# Altium PCB board_2.PcbDoc (part 1 of 4)
Units mm, origin at the board's own origin, x right, y up, seen from the top; angles counter-clockwise.
Board outline 144.25 x 129 mm, 8 copper layers (Top Layer, PWR, Layer2, Layer3, Layer4, Layer5, GND, Bottom Layer); 112 components, 273 nets, 1028 pads, 798 vias.
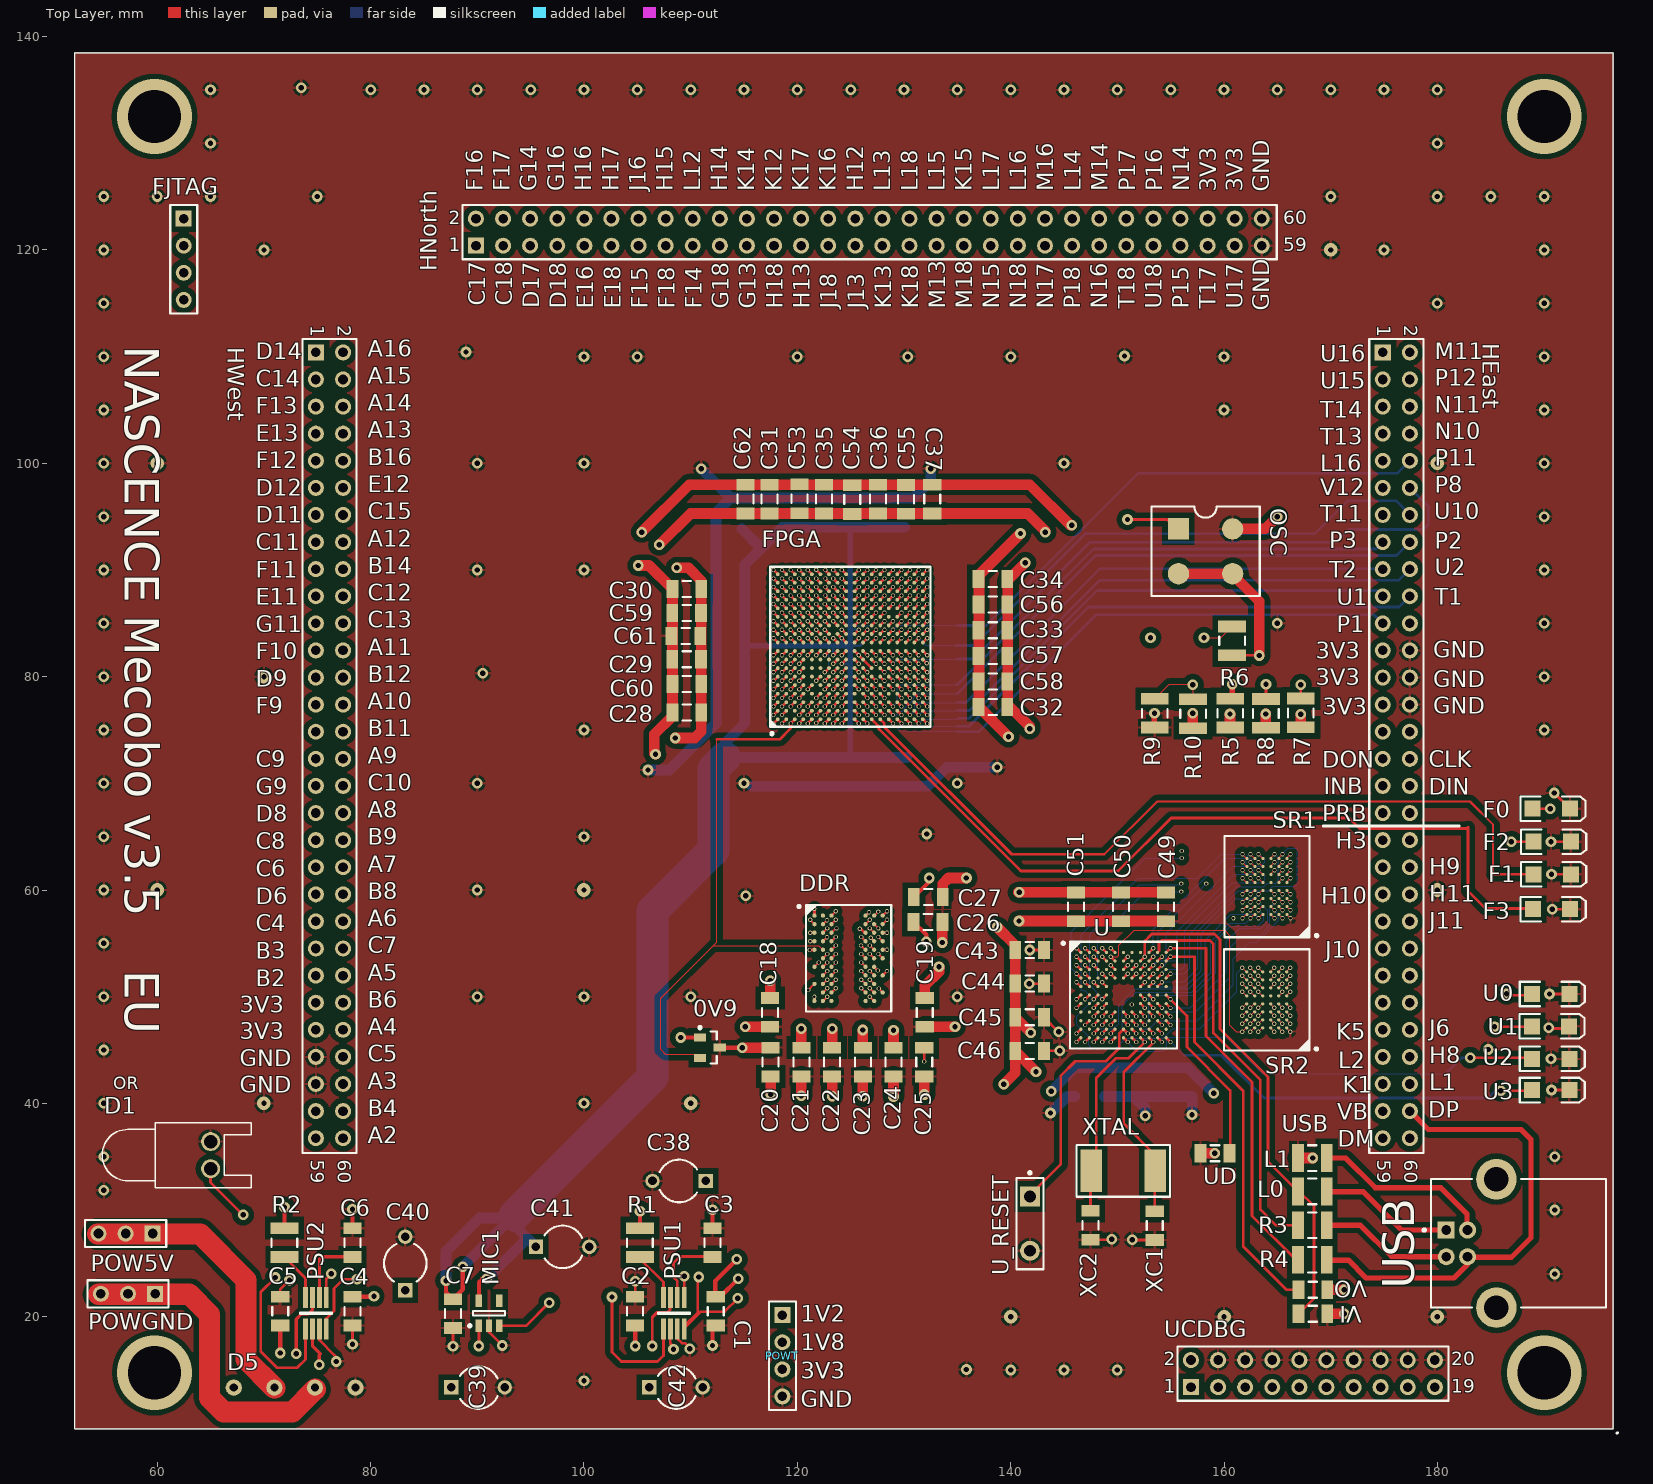
[diagram p0: Top Layer view]
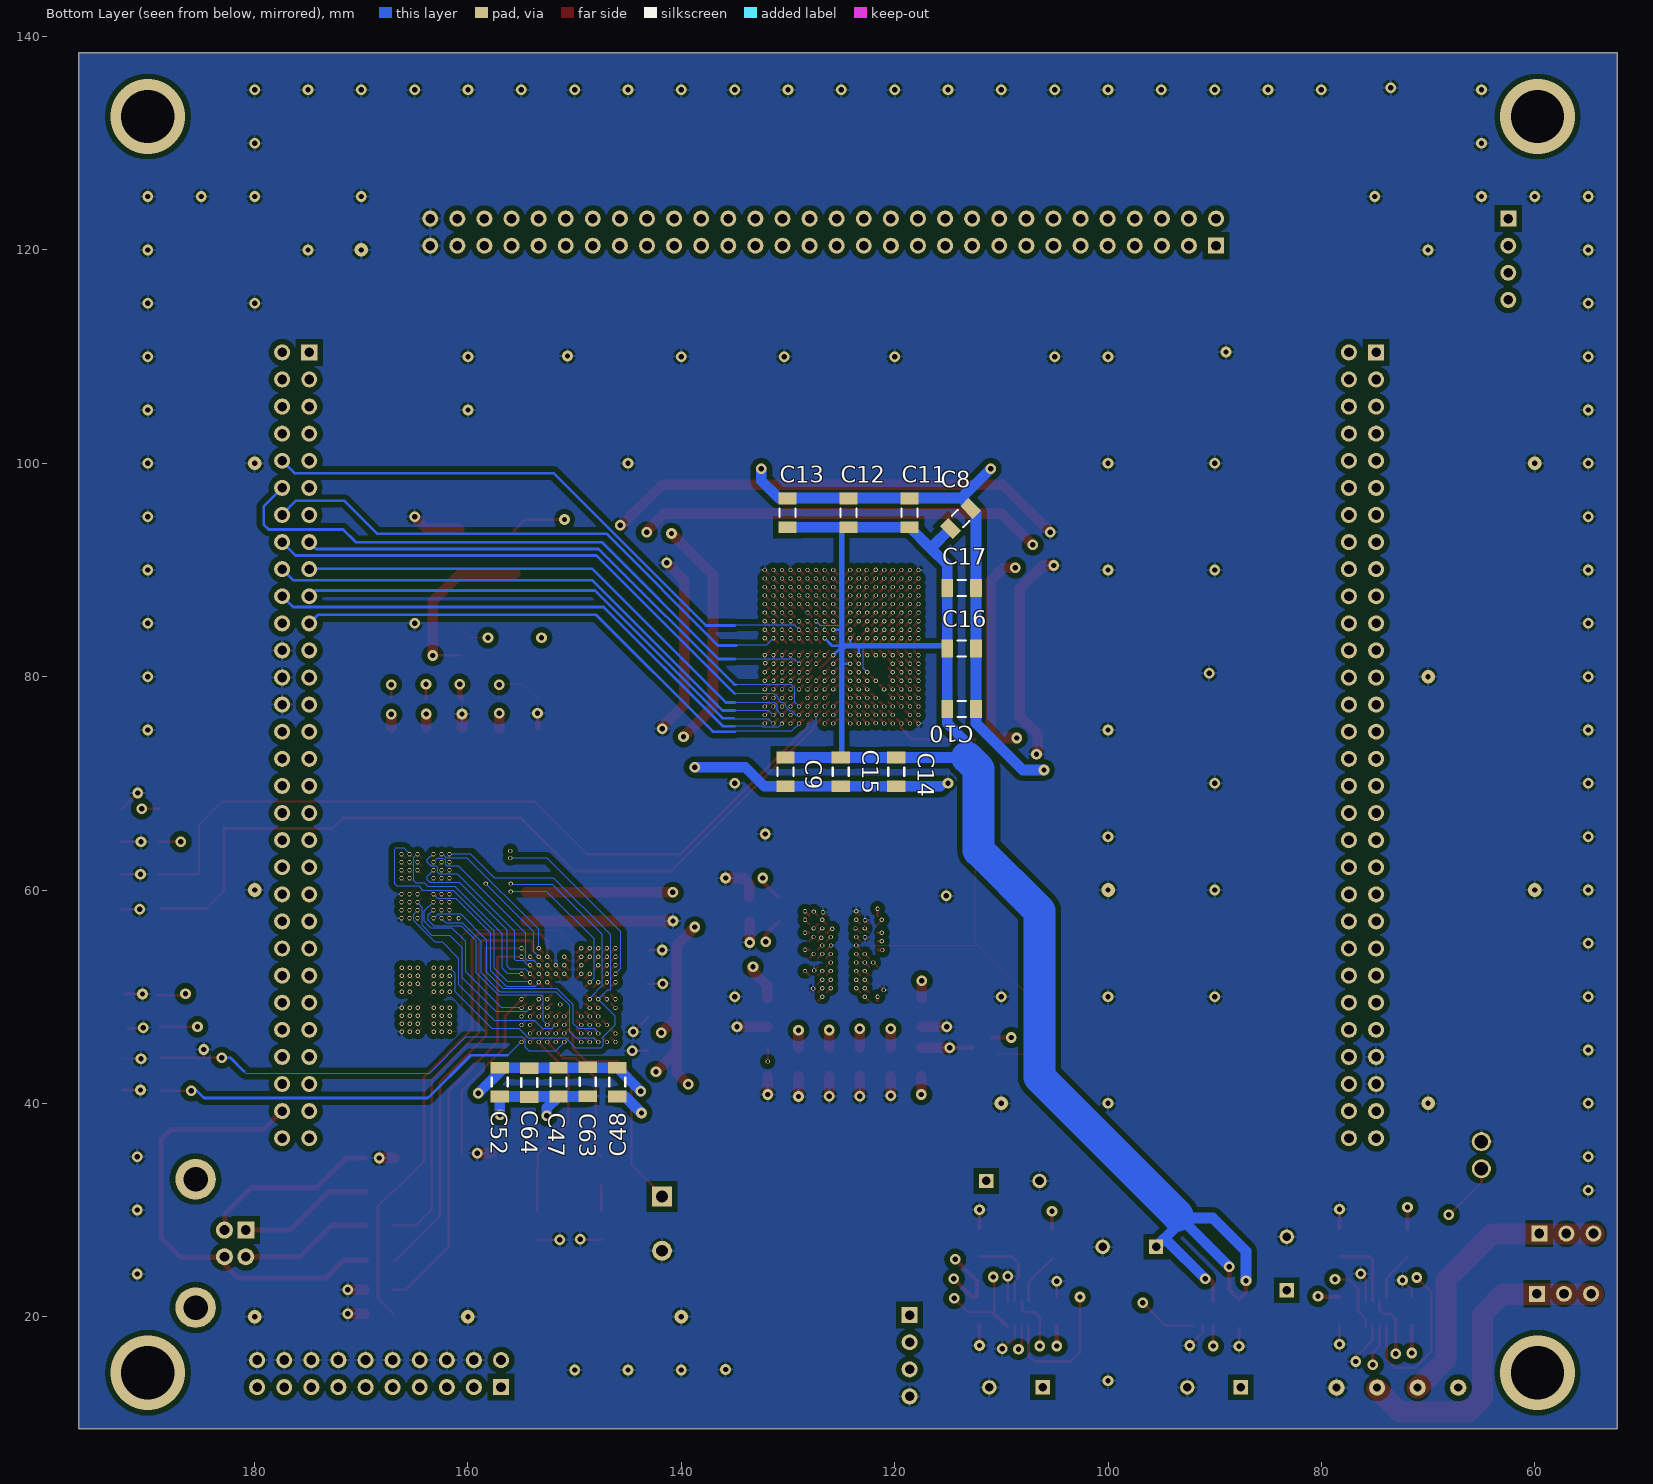
[diagram p1: Bottom Layer view, seen from below]
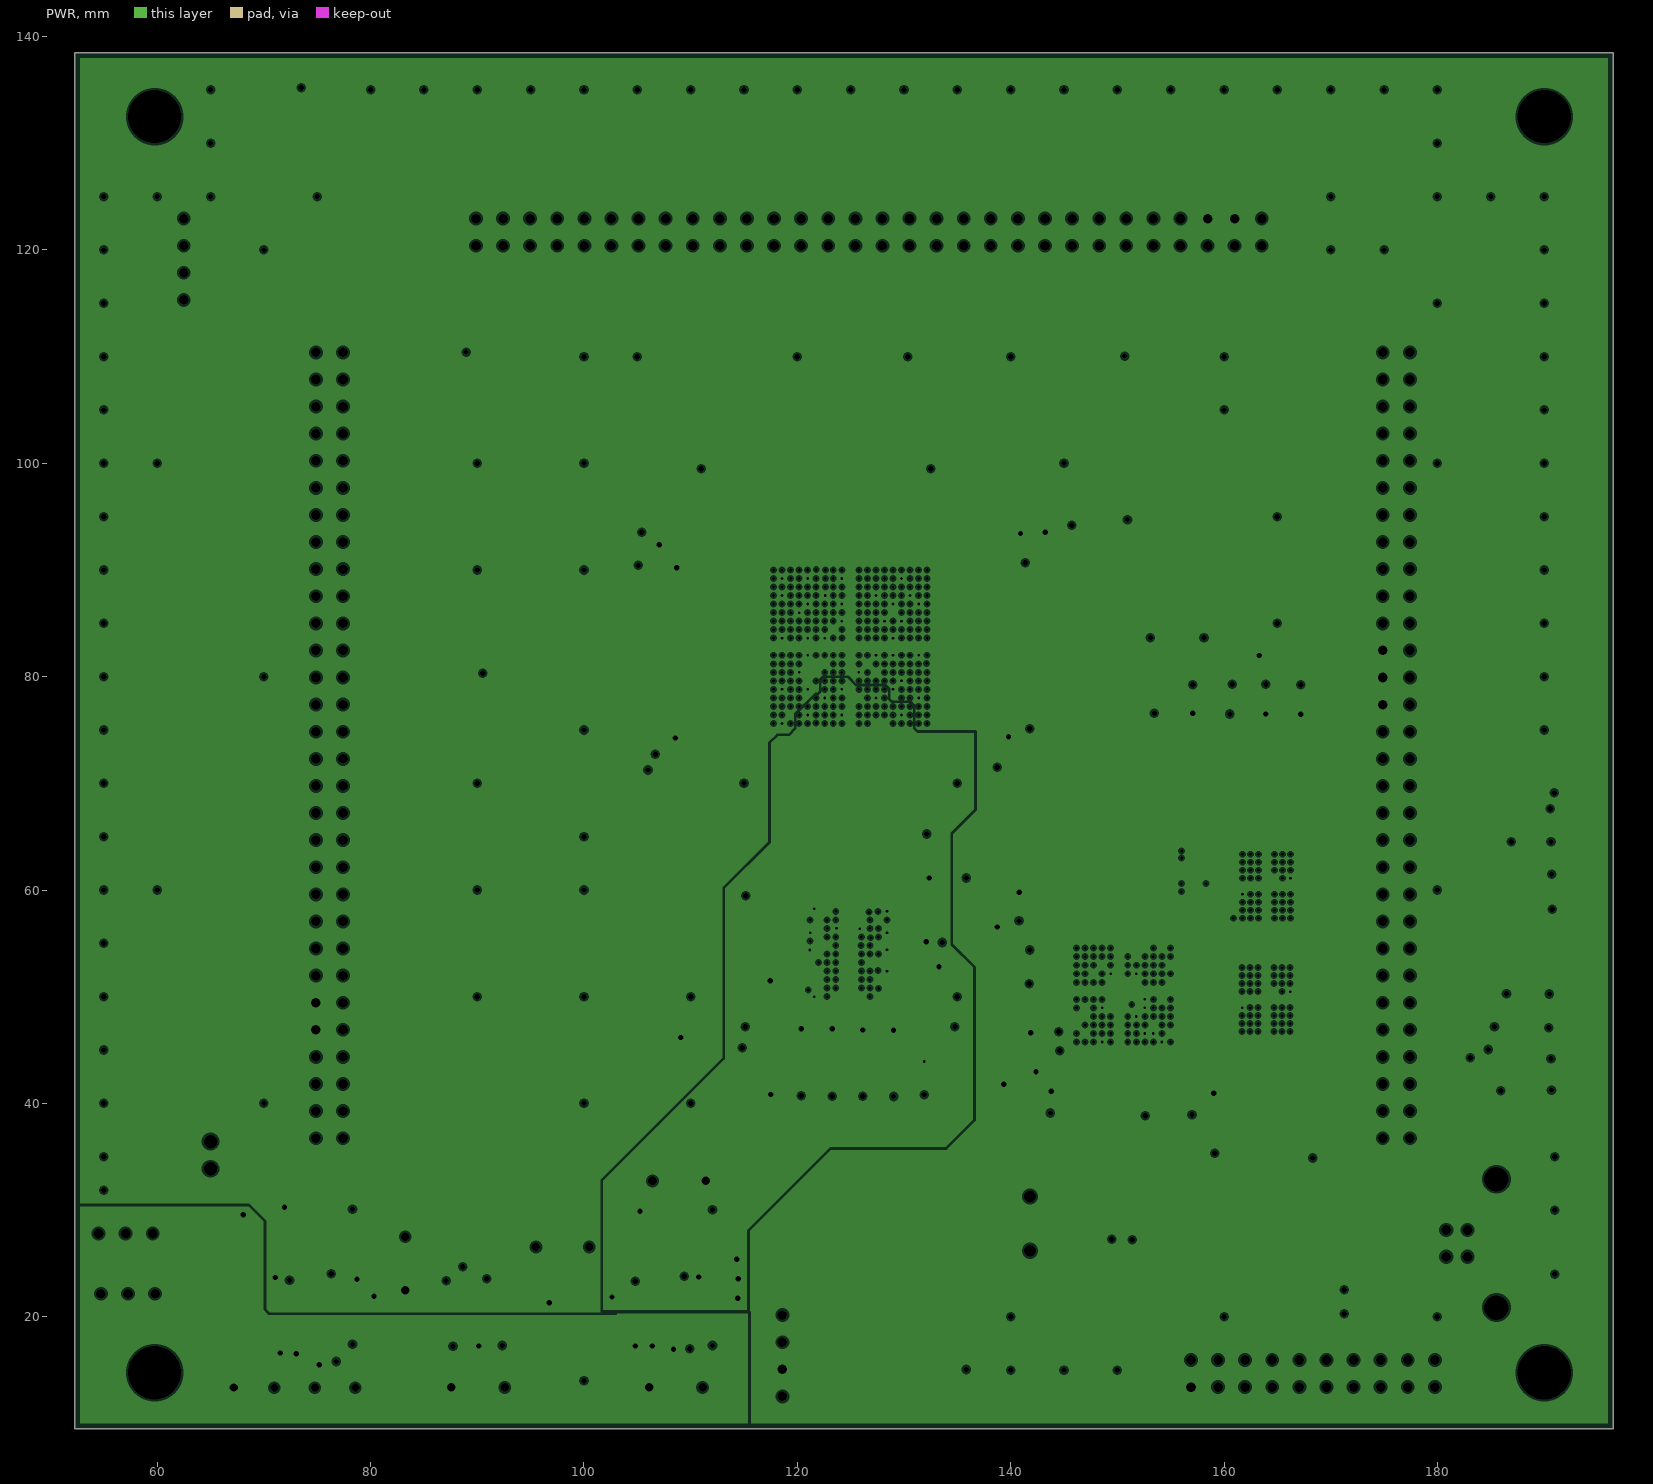
[diagram p2: PWR, clearances drawn from the general rule]
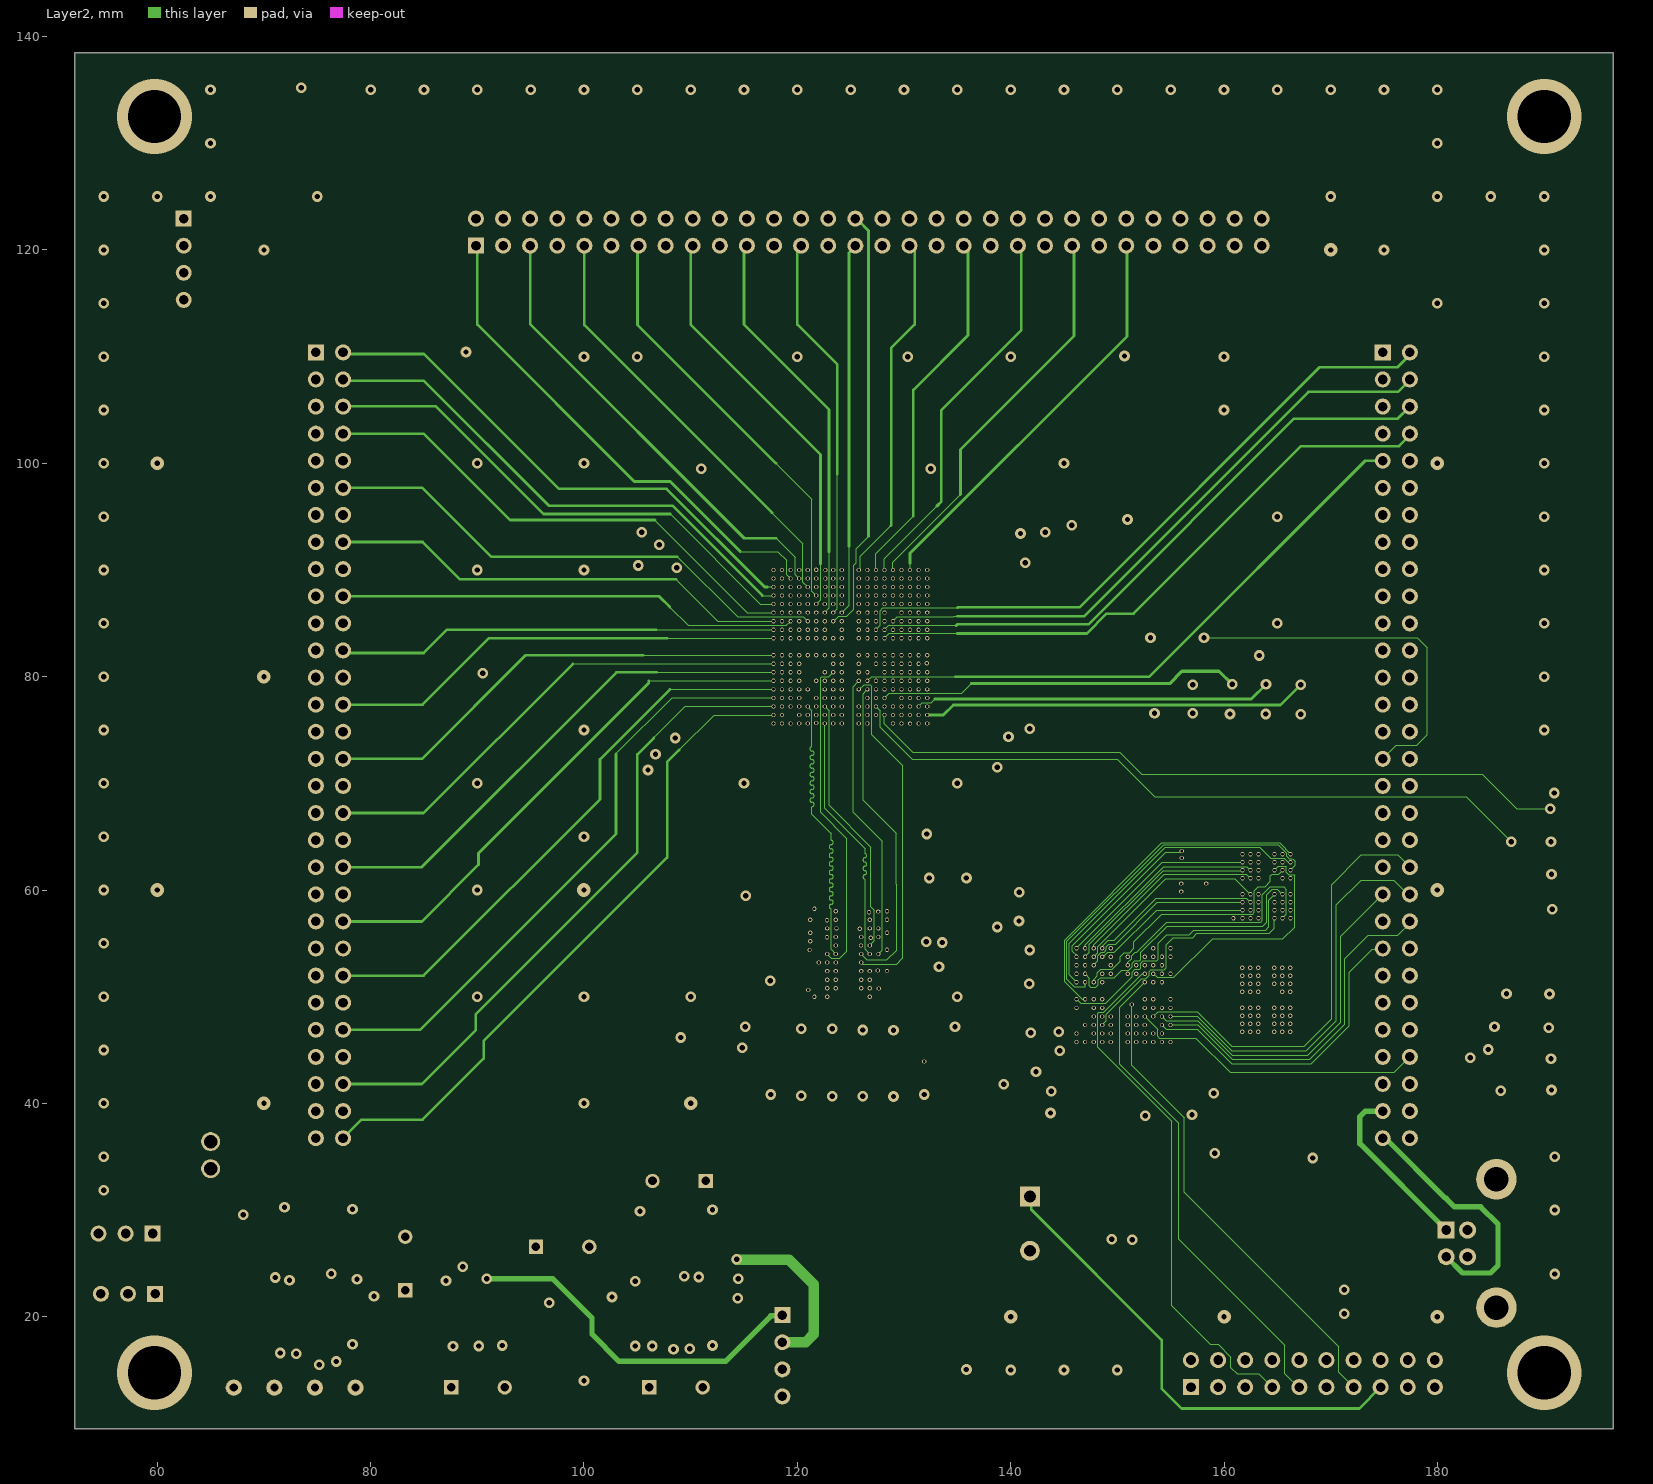
[diagram p3: Layer2]
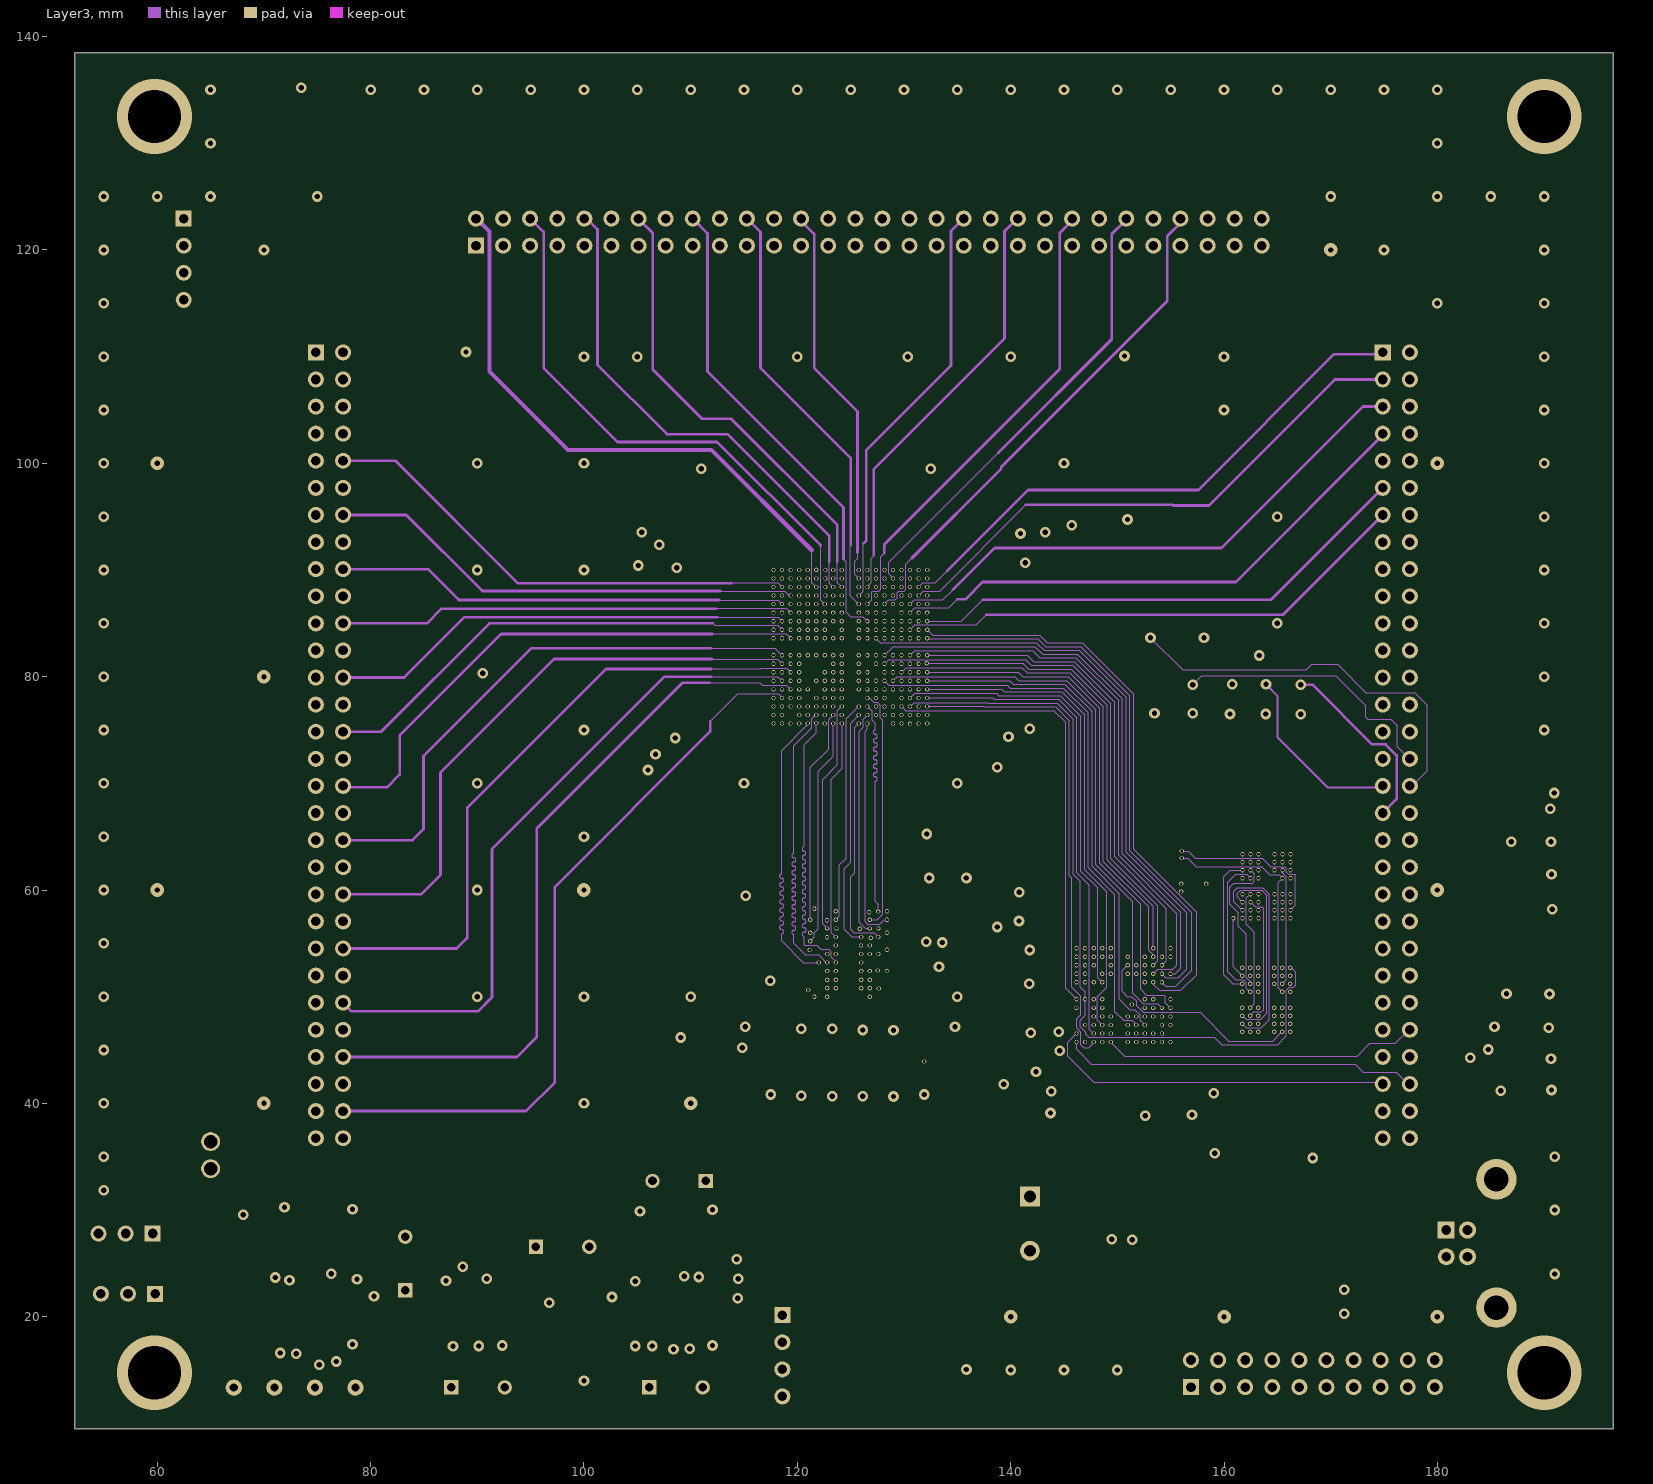
[diagram p4: Layer3]
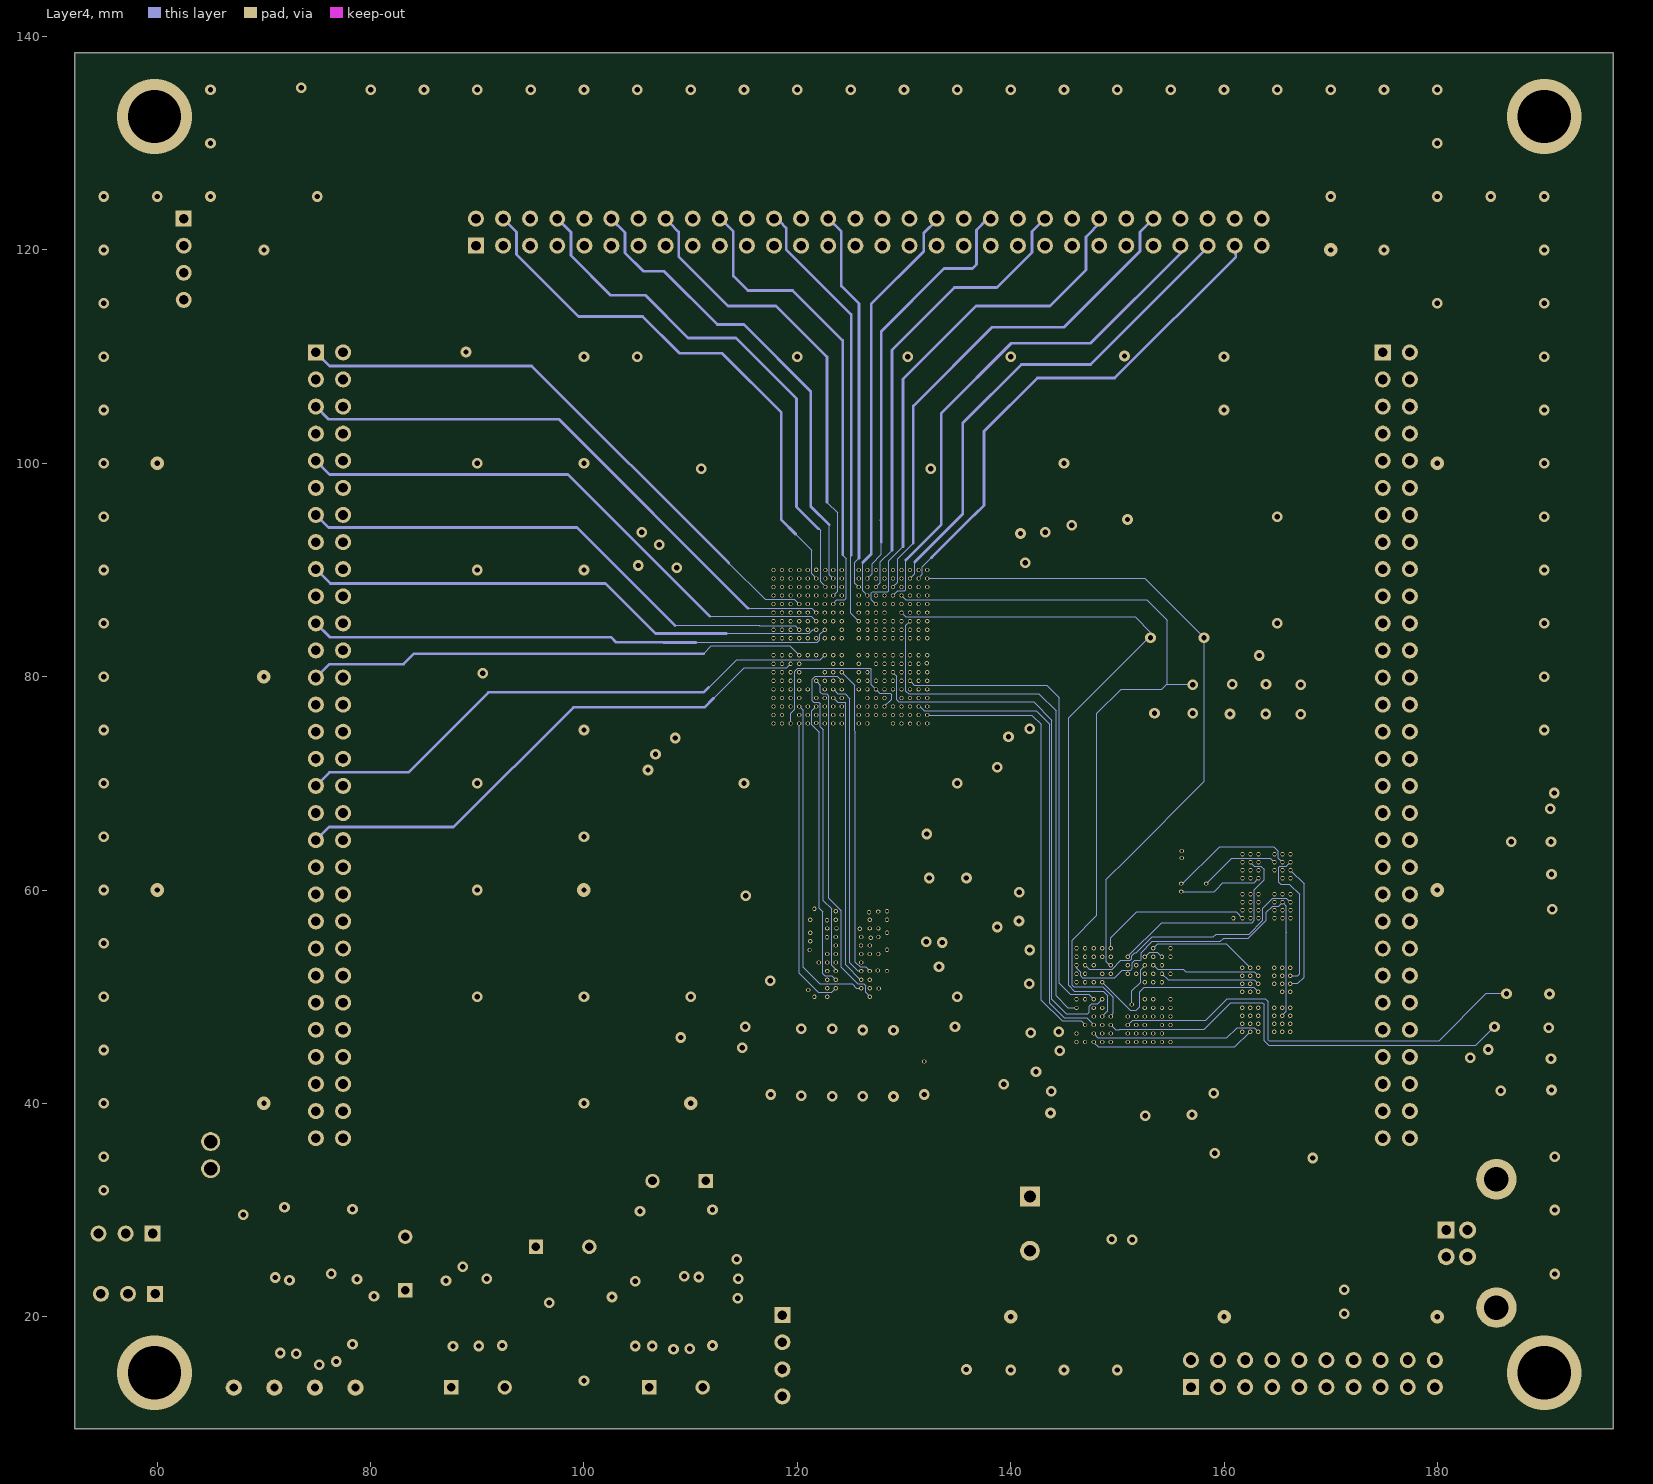
[diagram p5: Layer4]
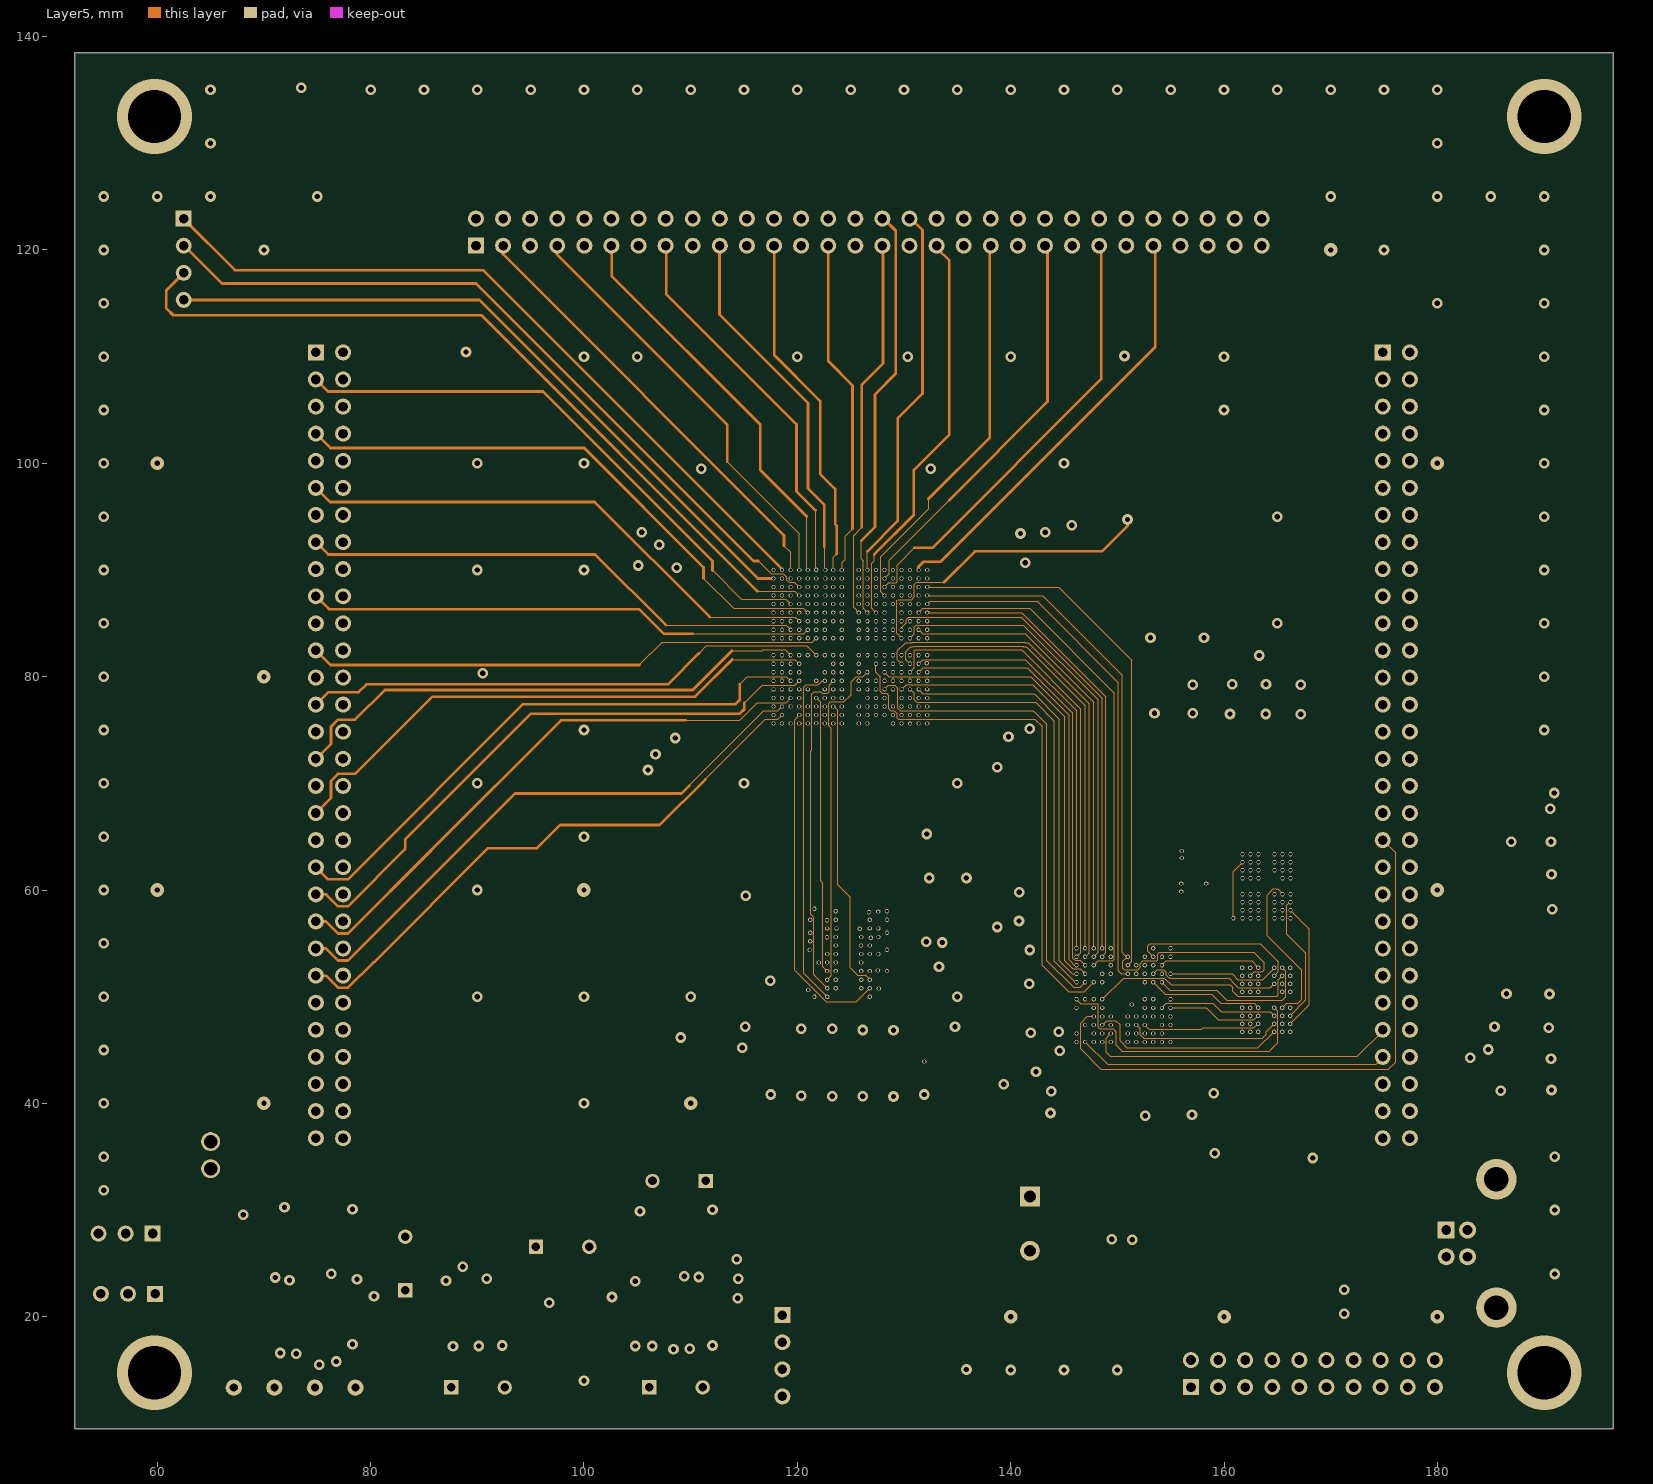
[diagram p6: Layer5]
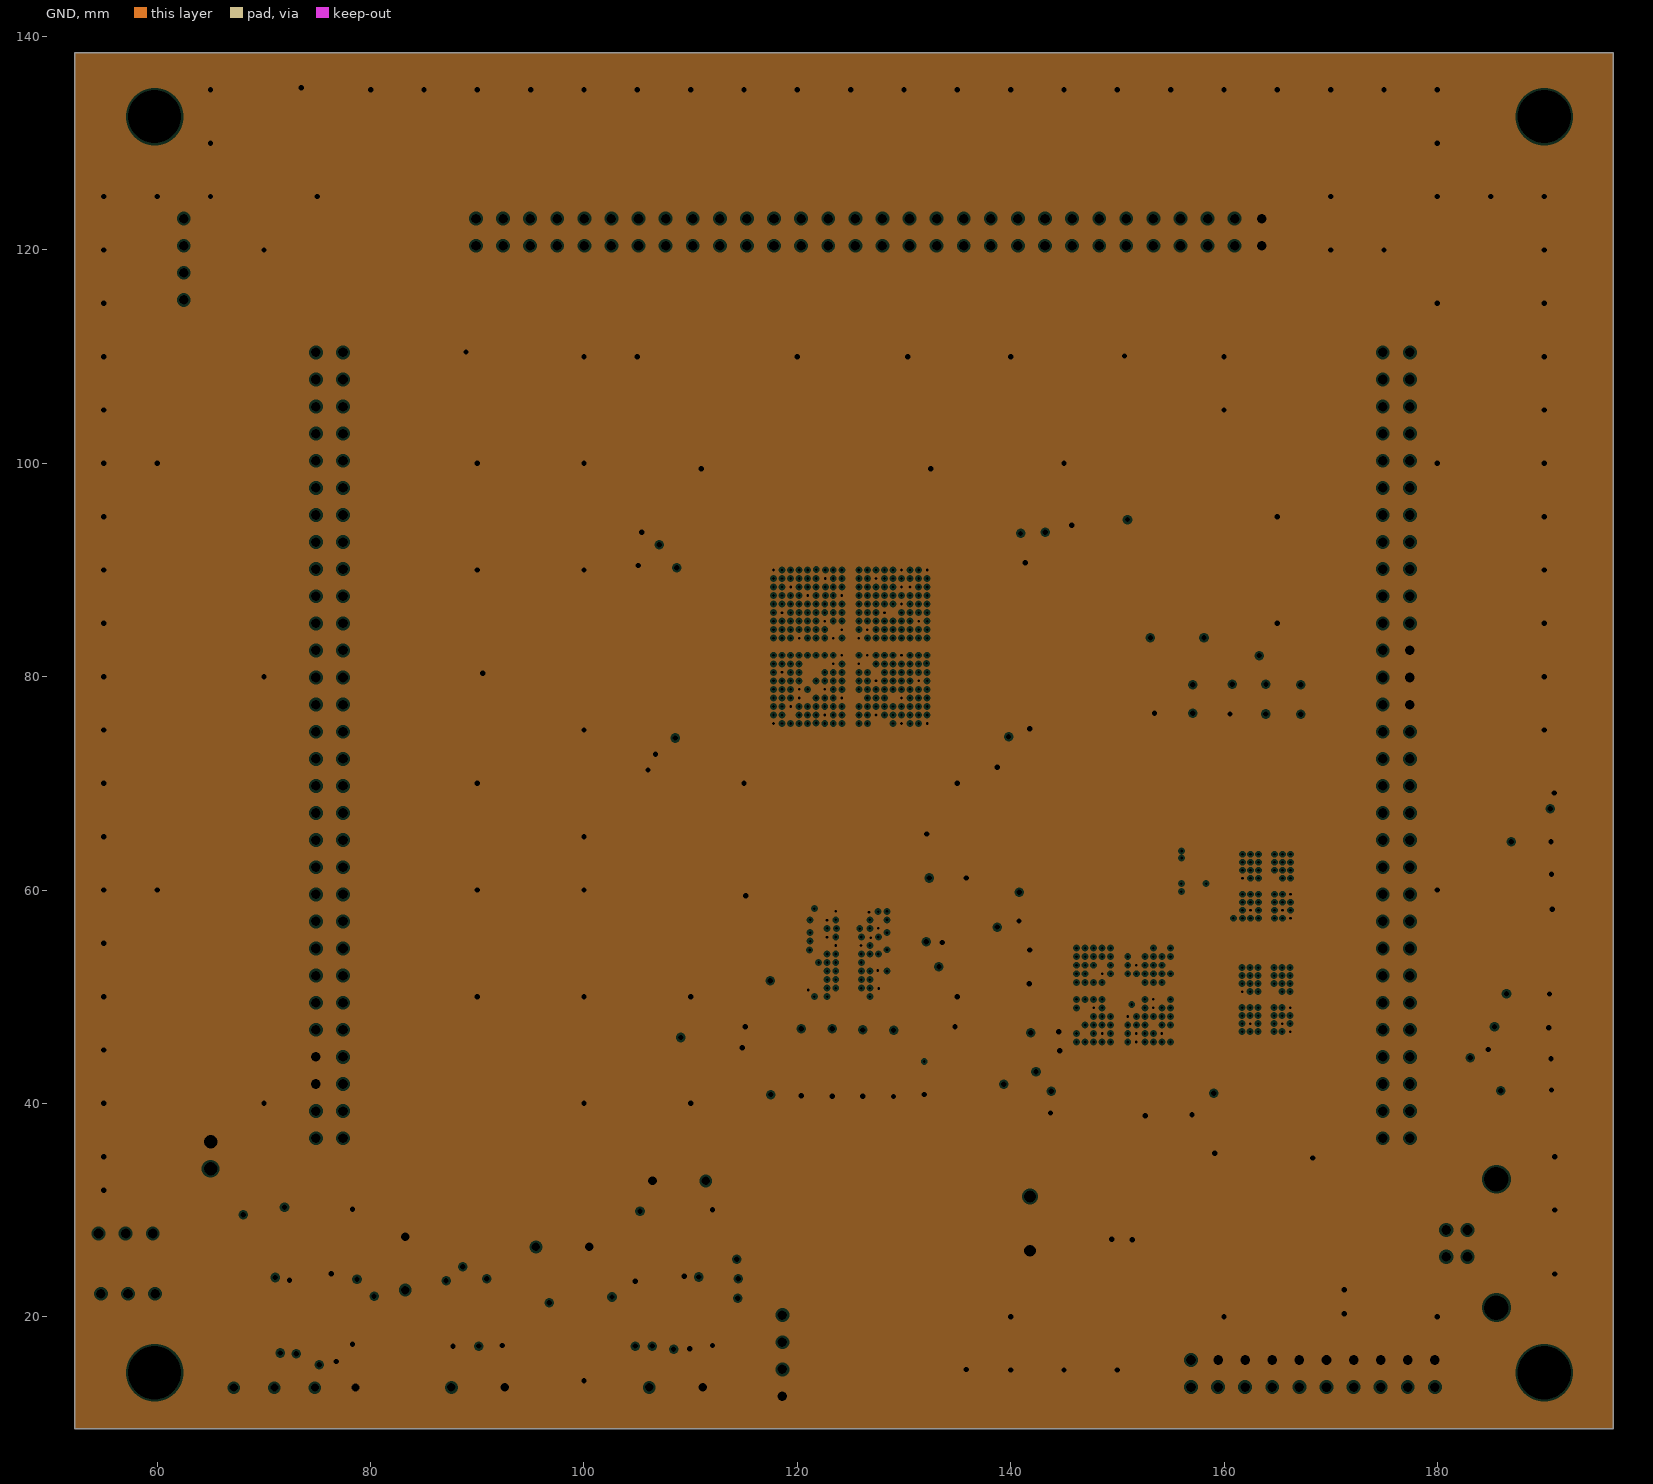
[diagram p7: GND, clearances drawn from the general rule]

## Layer stack, top to bottom
Top Layer: signal copper 0.0356
Dielectric: core 0.32, FR-4, Dk 4.8
PWR: plane copper 0.0356, net (Multiple Nets)
Dielectric: prepreg 0.32, FR-4, Dk 4.8
Layer2: signal copper 0.0356
Dielectric: core 0.32, FR-4, Dk 4.8
Layer3: signal copper 0.0356
Dielectric: prepreg 0.32, FR-4, Dk 4.8
Layer4: signal copper 0.0356
Dielectric: core 0.32, FR-4, Dk 4.8
Layer5: signal copper 0.0356
Dielectric: prepreg 0.32, FR-4, Dk 4.8
GND: plane copper 0.0356, net GND
Dielectric: core 0.32, FR-4, Dk 4.8
Bottom Layer: signal copper 0.0356

## Board outline
52.25,138.5 196.5,138.5 196.5,9.5 52.25,9.5

## Design rules (kind name [scope] priority, off if disabled: settings)
Clearance Clearance_9 [InNamedPolygon('Top Layer-No Net1')] p1: gap=0.5
Clearance Clearance_8 [InNamedPolygon('Top Layer-No Net')] p2: gap=0.5
Clearance Clearance_7 [InNamedPolygon('Top Layer-No Net1')] p3: gap=0.5
Clearance Clearance_6 [InNamedPolygon('Top Layer-No Net1')] p4: gap=0.5
Clearance Clearance_5 [InNamedPolygon('Top Layer-No Net1')] p5: gap=0.5
Clearance Clearance_4 [InNamedPolygon('Top Layer-No Net1')] p6: gap=0.5
Clearance Clearance_3 [InNamedPolygon('Top Layer-No Net')] p7: gap=0.5
Clearance Clearance_2 [InNamedPolygon('Top Layer-No Net')] p8: gap=0.5
Clearance Clearance_1 [InNamedPolygon('Top Layer-No Net')] p9: gap=0.5
Clearance "DDR DQ signals" [(InNetClass('DDR2.DDR_A[14..0]') OR InNet('DDR2.DDR_CLK_N') OR InNet('DDR2.DDR_CLK_P') OR InNet('DDR2.DDR_DQS_P') OR InNet('DDR2.DDR_ODT')OR InNet('DDR2.DDR_CASN') OR InNet('DDR2.DDR_WE') OR InNet('DDR2.DDR_RASN') OR InNetClass('DDR2.DDR_DQ[7..0]') OR InNet('DDR2.DDR_BA0') OR InNet('DDR2.DDR_BA1') OR InNet('DDR2.DDR_BA2') OR InNetClass('DDR2.DDR_DQ[7..0]') OR InNet('DDR2.DDR_DQS_N') OR InNet('DDR2.DDR_DQS_P') OR InNet('DDR2.DDR_LDM') OR InNetClass('DDR2.DDR_A[14..0]')) and (OnLayer('Layer2') or OnLayer('Layer3') or OnLayer('Layer4')) vs (InNetClass('DDR2.DDR_A[14..0]') OR InNet('DDR2.DDR_CLK_N') OR InNet('DDR2.DDR_CLK_P') OR InNet('DDR2.DDR_DQS_P') OR InNet('DDR2.DDR_ODT')OR InNet('DDR2.DDR_CASN') OR InNet('DDR2.DDR_WE') OR InNet('DDR2.DDR_RASN') OR InNetClass('DDR2.DDR_DQ[7..0]') OR InNet('DDR2.DDR_BA0') OR InNet('DDR2.DDR_BA1') OR InNet('DDR2.DDR_BA2') OR InNetClass('DDR2.DDR_DQ[7..0]') OR InNet('DDR2.DDR_DQS_N') OR InNet('DDR2.DDR_DQS_P') OR InNet('DDR2.DDR_LDM') OR InNetClass('DDR2.DDR_A[14..0]')) and (OnLayer('Layer2') or OnLayer('Layer3') or OnLayer('Layer4'))] p10: gap=0.3
Clearance DDR_ADDR_AND_CONTROL [(InNetClass('DDR2.DDR_A[14..0]') OR     InNet('DDR2.DDR_BA0') OR InNet('DDR2.DDR_BA1') OR InNet('DDR2.DDR_BA2')) and (OnLayer('Layer3') or OnLayer('Layer4')) vs (   InNetClass('DDR2.DDR_A[14..0]') OR     InNet('DDR2.DDR_BA0') OR InNet('DDR2.DDR_BA1') OR InNet('DDR2.DDR_BA2') ) and (not IsVia)] p11: gap=0.3
Clearance "BGA clearance" [IsTrack vs not IsVia] p12: gap=0.1
Clearance [All] p13: gap=0.1
DiffPairsRouting [All] p1: maxlimit=0.254 minlimit=0.254 mostfreqgap=0.254 maxuncoupledlength=12.7
FanoutControl Fanout_BGA [IsBGA] p1: bgadir=Out bgaviamode=Centered fanoutstyle=BGA fanoutdirection=Alternating viagrid=0.025 // Fanout_BGA (Default Rule)
FanoutControl Fanout_Default [All] p5: bgadir=Out bgaviamode=Centered fanoutstyle=BGA fanoutdirection=Alternating viagrid=0.025 // Fanout_Default (Default Rule)
HoleSize [All] p1: absolutevalues=TRUE maxlimit=5 minlimit=0.025 maxpercent=80.000 minpercent=20.000
MatchedLengths CLK_AND_DQS [InNet('DDR2.DDR_DQS_P') OR InNet('DDR2.DDR_CLK_P')] p1: tolerance=6.53 checknetsindiffpair=TRUE checkdiffpairvsdiffpair=TRUE checkothers=TRUE
MatchedLengths DDR_CLK_DIFF_PAIR [InNet('DDR2.DDR_CLK_N')OR InNet('DDR2.DDR_CLK_P')] p2: tolerance=0.254 checknetsindiffpair=TRUE checkdiffpairvsdiffpair=TRUE checkothers=TRUE
MatchedLengths DQS_DIFF_PAIR [InNet('DDR2.DDR_DQS_N') OR InNet('DDR2.DDR_DQS_P')] p3: tolerance=0.254 checknetsindiffpair=TRUE checkdiffpairvsdiffpair=TRUE checkothers=TRUE
MatchedLengths DDR_ADDR [InNetClass('DDR2.DDR_A[13..0]') OR InNet('DDR2.DDR_CLK_N') OR InNet('DDR2.DDR_CLK_P') OR InNet('DDR2.DDR_BA0') OR InNet('DDR2.DDR_BA1') OR InNet('DDR2.DDR_BA2') OR InNet('DDR2.DDR_CASN') OR InNet('DDR2.DDR_RASN') OR InNet('DDR2.DDR_CKE') OR InNet('DDR2.DDR_WE') OR InNet('DDR2.DDR_ODT')] p4: tolerance=7.62 checknetsindiffpair=TRUE checkdiffpairvsdiffpair=TRUE checkothers=TRUE
MatchedLengths DDR_DQ_GROUP [(InNetClass('DDR2.DDR_DQ[7..0]')) OR InNet('DDR2.DDR_DQS_N') OR InNet('DDR2.DDR_DQS_P') OR InNet('DDR2.DDR_LDM')] p5 off: tolerance=3.81 checknetsindiffpair=TRUE checkdiffpairvsdiffpair=TRUE checkothers=TRUE
MaxMinImpedance [InNet('DDR_CLK_N')] p1: minimum=95.00 maximum=105.0
MinimumSolderMaskSliver [All] p1: minsoldermaskwidth=0
PlaneClearance SRAM [InComponent('SR1')  and IsVia] p1 off: clearance=1
PlaneClearance [All] p2: clearance=0.2
PlaneConnect [All] p1: planeconnectstyle=Direct reliefexpansion=0.508 reliefentries=4 reliefconductorwidth=0.254 reliefairgap=0.254
PolygonConnect [All] p1: connectstyle=Relief reliefconductorwidth=0.254 reliefentries=4 polygonreliefangle="90 Angle" airgapwidth=0.254
RoutingLayers RoutingLayers_1 [All] p1: top layer_v5=TRUE mid layer 1_v5=TRUE mid layer 2_v5=TRUE mid layer 3_v5=TRUE mid layer 4_v5=TRUE bottom layer_v5=TRUE
RoutingLayers "DDR Layers" [(InNetClass('DDR_DQ[7..0]'))] p2: top layer_v5=FALSE mid layer 1_v5=TRUE mid layer 2_v5=TRUE mid layer 3_v5=TRUE mid layer 4_v5=TRUE bottom layer_v5=FALSE
RoutingPriority DDR_DQ [(InNetClass('DDR_DQ[7..0]') OR InNet('DDR_DQS') OR InNet('DDR_LDM'))] p1: routingpriority=100
RoutingPriority [All] p2: routingpriority=0
RoutingVias [All] p1: holewidth=0.2 width=0.4 viastyle="Through Hole" minholewidth=0.2 minwidth=0.35 maxholewidth=1 maxwidth=3
SMDNeckDown [All] p1: percent=100.000
SilkToSilkClearance [All] p1 off: silktosilkclearance=0.254
SilkscreenOverComponentPads RESET_Button_Waiver [HasFootprint('SPST-2')] p1: minsilkscreentomaskgap=0.1
SilkscreenOverComponentPads SilkscreenOverComponentPads_1 [All] p2: minsilkscreentomaskgap=0.254
SolderMaskExpansion SolderMaskExpansion_FPGA_BGA_Breakout [(HasFootprint('CSG324'))] p1: expansion=0.06
SolderMaskExpansion [All] p2: expansion=0.102
Width [All] p1: maxlimit=5 minlimit=0.1 preferedwidth=0.1
17 further rules are at their usual default settings.

## Classes and differential pairs
component class Headers: HEast HNorth HWest
component class DDR2_MEMORY: DDR
component class U_psu: 0V9 C38 C39 C40 C41 C42 D1 D5 POW5V POWGND POWT
net class DDR2.DDR_DQ[7..0]: DDR2.DDR_DQ0 DDR2.DDR_DQ1 DDR2.DDR_DQ2 DDR2.DDR_DQ3 DDR2.DDR_DQ4 DDR2.DDR_DQ5 DDR2.DDR_DQ6 DDR2.DDR_DQ7
net class DDR2.DDR_A[13..0]: DDR2.DDR_A0 DDR2.DDR_A1 DDR2.DDR_A2 DDR2.DDR_A3 DDR2.DDR_A4 DDR2.DDR_A5 DDR2.DDR_A6 DDR2.DDR_A7 DDR2.DDR_A8 DDR2.DDR_A9 DDR2.DDR_A10 DDR2.DDR_A11 DDR2.DDR_A12 DDR2.DDR_A13
component class toplevel: L1 OSC R5 USB
net class HEADERS.HW[52..0]: HEADERS.HW0 HEADERS.HW1 HEADERS.HW2 HEADERS.HW3 HEADERS.HW4 HEADERS.HW5 HEADERS.HW6 HEADERS.HW7 HEADERS.HW8 HEADERS.HW9 HEADERS.HW10 HEADERS.HW11 HEADERS.HW12 HEADERS.HW13 HEADERS.HW14 HEADERS.HW15 HEADERS.HW16 HEADERS.HW17 HEADERS.HW18 HEADERS.HW19 HEADERS.HW20 HEADERS.HW21 HEADERS.HW22 HEADERS.HW23 HEADERS.HW24 HEADERS.HW25 HEADERS.HW26 HEADERS.HW27 HEADERS.HW28 HEADERS.HW29 HEADERS.HW30 HEADERS.HW31 HEADERS.HW32 HEADERS.HW33 HEADERS.HW34 HEADERS.HW35 HEADERS.HW36 HEADERS.HW37 HEADERS.HW38 HEADERS.HW39 HEADERS.HW40 HEADERS.HW41 HEADERS.HW42 HEADERS.HW43 HEADERS.HW44 HEADERS.HW45 HEADERS.HW46 HEADERS.HW47 HEADERS.HW48 HEADERS.HW49 HEADERS.HW50 HEADERS.HW51 HEADERS.HW52 HW0 HW1 HW2 HW3 HW4 HW5 HW6 HW7 HW8 HW9 HW10 HW11 HW12 HW13 HW14 HW15 HW16 HW17 HW18 HW19 HW20 HW21 HW22 HW23 HW24 HW25 HW26 HW27 HW28 HW29 HW30 HW31 HW32 HW33 HW34 HW35 HW36 HW37 HW38 HW39 HW40 HW41 HW42 HW43 HW44 HW45 HW46 HW47 HW48 HW49 HW50 HW51 HW52 HW53 HW54 HW55 HW59
component class "EFN32GG990 (uC)": L0 R3 R4 U U0 U1 U2 U3 U_RESET UCDBG UD VI VO XC1 XC2 XTAL
net class HEADERS.HN[55..0]: HEADERS.HN0 HEADERS.HN1 HEADERS.HN2 HEADERS.HN3 HEADERS.HN4 HEADERS.HN5 HEADERS.HN6 HEADERS.HN7 HEADERS.HN8 HEADERS.HN9 HEADERS.HN10 HEADERS.HN11 HEADERS.HN12 HEADERS.HN13 HEADERS.HN14 HEADERS.HN15 HEADERS.HN16 HEADERS.HN17 HEADERS.HN18 HEADERS.HN19 HEADERS.HN20 HEADERS.HN21 HEADERS.HN22 HEADERS.HN23 HEADERS.HN24 HEADERS.HN25 HEADERS.HN26 HEADERS.HN27 HEADERS.HN28 HEADERS.HN29 HEADERS.HN30 HEADERS.HN31 HEADERS.HN32 HEADERS.HN33 HEADERS.HN34 HEADERS.HN35 HEADERS.HN36 HEADERS.HN37 HEADERS.HN38 HEADERS.HN39 HEADERS.HN40 HEADERS.HN41 HEADERS.HN42 HEADERS.HN43 HEADERS.HN44 HEADERS.HN45 HEADERS.HN46 HEADERS.HN47 HEADERS.HN48 HEADERS.HN49 HEADERS.HN50 HEADERS.HN51 HEADERS.HN52 HEADERS.HN53 HEADERS.HN54 HEADERS.HN55 HN0 HN1 HN2 HN3 HN4 HN5 HN6 HN7 HN8 HN9 HN10 HN11 HN12 HN13 HN14 HN15 HN16 HN17 HN18 HN19 HN20 HN21 HN22 HN23 HN24 HN25 HN26 HN27 HN28 HN29 HN31 HN32 HN33 HN34 HN35 HN36 HN37 HN38 HN39 HN40 HN41 HN42 HN43 HN44 HN45 HN46 HN47 HN48 HN49 HN50 HN51 HN52 HN53 HN54 HN55 HN56 HN57 HN58 HN59
component class U_xcs6slx25-2csg324i: * F0 F1 F2 F3 FJTAG FPGA FPGAA FPGAB FPGAC FPGAD FPGAE FPGAF FPGAG FPGAH R6 R7 R8 R9 R10
net class ADDR[20..0]: ADDR0 ADDR1 ADDR2 ADDR3 ADDR4 ADDR5 ADDR6 ADDR7 ADDR8 ADDR9 ADDR10 ADDR11 ADDR12 ADDR13 ADDR14 ADDR15 ADDR16 ADDR17 ADDR18 ADDR19 ADDR20
net class DATA[15..0]: DATA0 DATA1 DATA2 DATA3 DATA4 DATA5 DATA6 DATA7 DATA8 DATA9 DATA10 DATA11 DATA12 DATA13 DATA14 DATA15
net class HE[0..24]: HE2 HE3 HE4 HE5 HE6 HE7 HE8 HE9 HE10 HE11 HE12 HE13 HE14 HE15 HE16 HE17 HE18 HE19 HE20 HE21 HE22
net class MISC[27..0]: MISC0 MISC1 MISC2 MISC3 MISC4 MISC8 MISC10 MISC11 MISC12 MISC13 MISC14 MISC15 MISC16 MISC18 MISC19 MISC21 MISC23 MISC24 MISC25 MISC26 MISC27
component class MAX8860EUA18: C1 C2 C3 PSU1 R1
component class MAX8860EUA33: C4 C5 C6 PSU2 R2
component class U_MIC5248: C7 MIC1
channel class 8860: MAX8860EUA18 MAX8860EUA33
component class U_decoupling: C8 C9 C10 C11 C12 C13 C14 C15 C16 C17 C18 C19 C20 C21 C22 C23 C24 C25 C26 C27 C28 C29 C30 C31 C32 C33 C34 C35 C36 C37 C43 C44 C45 C46 C47 C48 C49 C50 C51 C52 C53 C54 C55 C56 C57 C58 C59 C60 C61 C62 C63 C64
component class SRAMs: SR1 SR2
differential pair DDR2.DDR_CLK: +DDR2.DDR_CLK_P -DDR2.DDR_CLK_N
differential pair DDR2.DDR_DQS: +DDR2.DDR_DQS_P -DDR2.DDR_DQS_N

## Components (designator, comment, footprint, x,y, rotation, side; value= is the part's Value field where it differs from the comment)
0V9 "ISL21080DIH309Z-TK" SOT95P215X112-3N 111.8,45.225 r0 top
C1 "Cap Semi" C1206 112.35,20.525 r90 top
C2 "Cap Semi" C1206 104.8,20.525 r270 top
C3 "Cap Semi" C1206 112.05,26.95 r270 top
C4 "Cap Semi" C1206 78.3,20.525 r90 top (schematic designator C1)
C5 "Cap Semi" C1206 71.525,20.525 r270 top (schematic designator C2)
C6 "Cap Semi" C1206 78.3,26.95 r270 top (schematic designator C3)
C7 "Cap Semi" C1206 87.725,20.3 r90 top (schematic designator C4)
C8 "Cap Semi" C1206 113.825,94.825 r315 bottom (schematic designator C5)
C9 "Cap Semi" C1206 130.25,71.075 r90 bottom (schematic designator C6)
C10 "Cap Semi" C1206 113.725,76.975 r0 bottom (schematic designator C7)
C11 "Cap Semi" C1206 118.6,95.35 r270 bottom (schematic designator C8)
C12 "Cap Semi" C1206 124.325,95.35 r270 bottom (schematic designator C9)
C13 "Cap Semi" C1206 130.05,95.35 r270 bottom (schematic designator C10)
C14 "Cap Semi" C1206 119.85,71.075 r90 bottom (schematic designator C11)
C15 "Cap Semi" C1206 125.05,71.075 r90 bottom (schematic designator C12)
C16 "Cap Semi" C1206 113.725,82.637 r0 bottom (schematic designator C13)
C17 "Cap Semi" C1206 113.725,88.3 r0 bottom (schematic designator C14)
C18 "Cap Semi" C1206 117.45,48.525 r90 top (schematic designator C15)
C19 "Cap Semi" C1206 131.95,48.525 r90 top (schematic designator C16)
C20 "Cap Semi" C1206 117.5,43.875 r270 top (schematic designator C17)
C21 "Cap Semi" C1206 120.38,43.875 r90 top (schematic designator C18)
C22 "Cap Semi" C1206 123.26,43.875 r90 top (schematic designator C19)
C23 "Cap Semi" C1206 126.14,43.875 r90 top (schematic designator C20)
C24 "Cap Semi" C1206 129.02,43.875 r90 top (schematic designator C21)
C25 "Cap Semi" C1206 131.9,43.875 r90 top (schematic designator C22)
C26 "Cap Semi" C1206 132.25,57 r180 top (schematic designator C23)
C27 "Cap Semi" C1206 132.275,59.35 r180 top (schematic designator C24)
C28 "Cap Semi" C1206 109.65,76.625 r0 top (schematic designator C25)
C29 "Cap Semi" C1206 109.625,81.625 r0 top (schematic designator C26)
C30 "Cap Semi" C1206 109.65,88.225 r0 top (schematic designator C27)
C31 "Cap Semi" C1206 117.4,96.65 r270 top (schematic designator C28)
C32 "Cap Semi" C1206 138.325,77.151 r180 top (schematic designator C29)
C33 "Cap Semi" C1206 138.325,84.35 r180 top (schematic designator C30)
C34 "Cap Semi" C1206 138.325,89.15 r180 top (schematic designator C31)
C35 "Cap Semi" C1206 122.483,96.65 r270 top (schematic designator C32)
C36 "Cap Semi" C1206 127.567,96.65 r270 top (schematic designator C33)
C37 "Cap Semi" C1206 132.65,96.65 r270 top (schematic designator C34)
C38 "Cap2" CAPR5-4X5 108.925,32.725 r180 top (schematic designator C)
C39 "Cap2" CAPR5-4X5 90.075,13.375 r0 top (schematic designator C)
C40 "Cap2" CAPR5-4X5 83.25,25 r90 top (schematic designator C)
C41 "Cap2" CAPR5-4X5 98,26.55 r0 top (schematic designator C)
C42 "Cap2" CAPR5-4X5 108.625,13.375 r0 top (schematic designator C6)
C43 "Cap Semi" C1206 141.775,54.375 r180 top (schematic designator C36)
C44 "Cap Semi" C1206 141.775,51.225 r180 top (schematic designator C37)
C45 "Cap Semi" C1206 141.775,48.075 r180 top (schematic designator C38)
C46 "Cap Semi" C1206 141.775,44.925 r180 top (schematic designator C39)
C47 "Cap Semi" C1206 151.512,42 r90 bottom (schematic designator C40)
C48 "Cap Semi" C1206 146,42 r90 bottom (schematic designator C41)
C49 "Cap Semi" C1206 154.55,58.425 r90 top (schematic designator C42)
C50 "Cap Semi" C1206 150.337,58.425 r90 top (schematic designator C43)
C51 "Cap Semi" C1206 146.125,58.425 r90 top (schematic designator C44)
C52 "Cap Semi" C1206 157.025,42 r90 bottom (schematic designator C45)
C53 "Cap Semi" C1206 120.2,96.675 r90 top (schematic designator C48)
C54 "Cap Semi" C1206 125.15,96.6 r270 top (schematic designator C49)
C55 "Cap Semi" C1206 130.175,96.625 r270 top (schematic designator C50)
C56 "Cap Semi" C1206 138.325,86.75 r180 top (schematic designator C51)
C57 "Cap Semi" C1206 138.325,81.95 r180 top (schematic designator C52)
C58 "Cap Semi" C1206 138.325,79.55 r180 top (schematic designator C53)
C59 "Cap Semi" C1206 109.625,85.95 r0 top (schematic designator C54)
C60 "Cap Semi" C1206 109.65,79.325 r0 top (schematic designator C55)
C61 "Cap Semi" C1206 109.55,83.825 r0 top (schematic designator C56)
C62 "Cap Semi" C1206 115.125,96.65 r270 top (schematic designator C57)
C63 "Cap Semi" C1206 148.775,42.025 r90 bottom (schematic designator C46)
C64 "Cap Semi" C1206 154.25,41.95 r90 bottom (schematic designator C47)
D1 "LED0" LED-0 65,35.15 r270 top (schematic designator D3)
D5 "Bridge2" "4 in line socket" 67.175,13.35 r0 top
DDR "MT47H128M8CF-25E" MICT-CF-60 124.8,53.6 r0 top
F0 "LED2" 3.2X1.6X1.1 190.675,67.625 r0 top
F1 "LED2" 3.2X1.6X1.1 190.75,61.475 r0 top
F2 "LED2" 3.2X1.6X1.1 190.75,64.525 r0 top
F3 "LED2" 3.2X1.6X1.1 190.7,58.2 r0 top
FJTAG "FPGA JTAG" HDR1X4 62.484,122.936 r270 top locked
FPGA "XC6SLX25-2CSG324I" CSG324 124.968,82.804 r90 top
HEast "Header 30X2" HDR2X30 174.876,110.396 r270 top locked
HNorth "Header 30X2" HDR2X30 89.876,120.396 r0 top locked
HWest "Header 30X2" HDR2X30 74.876,110.396 r270 top locked
L0 "Inductor" C1210 168.275,31.75 r0 top
L1 "Inductor" C1210 168.275,34.875 r0 top
MIC1 "MIC5248" SOT95P280X145-5N 91.1,20.325 r90 top
OSC "EuroQuartz OSC" SOP4 155.725,93.85 r0 top
POW5V "Header 3" HDR1X3 59.575,27.8 r180 top
POWGND "Header 3" HDR1X3 59.8,22.15 r180 top
POWT "Header 4" HDR1X4 118.6,20.15 r270 top
PSU1 "MAX8860EUA25+" TSOP65P300X110-8N 109.4,21.525 r90 top
PSU2 "MAX8860EUA25+" TSOP65P300X110-8N 75.85,21.525 r90 top (schematic designator PSU1)
R1 "Res3" 14-1210 105.25,26.95 r90 top
R2 "Res3" 14-1210 71.927,26.95 r90 top (schematic designator R1)
R3 "Res3" 14-1210 168.275,28.57 r0 top (schematic designator R10)
R4 "Res3" 14-1210 168.275,25.35 r0 top (schematic designator R11)
R5 "Res3" 14-1210 160.575,76.575 r90 top (schematic designator R8)
R6 "Res3" 14-1210 160.75,83.35 r90 top (schematic designator R1)
R7 "Res3" 14-1210 167.2,76.6 r90 top (schematic designator R2)
R8 "Res3" 14-1210 163.925,76.55 r90 top (schematic designator R3)
R9 "Res3" 14-1210 153.5,76.575 r90 top (schematic designator R4)
R10 "Res3" 14-1210 157.1,76.525 r90 top (schematic designator R5)
SR1 "Cypress 16Mbit RAM - CY7C1061DV33" BGA48C75P8X6_950X800X100 164.025,60.325 r180 top
SR2 "Cypress 16Mbit RAM - CY7C1061DV33" BGA48C75P8X6_950X800X100 164,49.7 r180 top
U "EFM32GG990F1024" BGA112 150.575,50.15 r0 top
U0 "LED2" 3.2X1.6X1.1 190.617,50.25 r0 top
U1 "LED2" 3.2X1.6X1.1 190.6,47.225 r0 top
U2 "LED2" 3.2X1.6X1.1 190.617,44.171 r0 top
U3 "LED2" 3.2X1.6X1.1 190.617,41.247 r0 top
U_RESET "SW-PB" SPST-2 141.8,28.725 r270 top
UCDBG "Header 10X2" HDR2X10 156.9,13.4 r0 top
UD "Cap Semi" C1206 159.15,35.325 r0 top
USB "USB Connector" USB2.5-2H4D 181.825,26.875 r0 top
VI "Cap Semi" C1206 168.325,20.275 r0 top
VO "Cap Semi" C1206 168.325,22.525 r0 top
XC1 "Cap Semi" C1206 153.5,28.55 r270 top
XC2 "Cap Semi" C1206 147.475,28.575 r270 top
XTAL "2PIN_SMD_XTAL" 48MHZ_XTAL_PAD 150.55,33.675 r180 top

## Footprints (in the part's own frame and the unit in brackets; to place one, negate y for a bottom-side part, rotate by r counter-clockwise, add the part's x,y. Pads: shape width x height; smd on the part's side, far side on the other; paste and mask are expansions set on the pad)
3.2X1.6X1.1 [mm] "SMT LED; 2 Flat Leads"
  rect 1.5x1.5 smd: 1(-1.75,0) 2(1.75,0)
  silkscreen extent -2.9,-1.15 3.2,1.15
"4 in line socket" [mil] "Bridge Rectifier; 4 Terminals; Body 16.8 x 16.8 mm (typ); Pitch 10.67 mm"
  round 60 hole 30: 1(0,0) 2(149.61,0) 3(299.21,0) 4(448.82,0)
14-1210 [mm] "Chip Resistor, Body 3.2x2.5mm, IPC High Density"
  rect 1.1x2.6 smd: 1(-1.35,0) 2(1.35,0)
  silkscreen extent -0.4,-1.2 0.4,1.2, body extent -1.68,-1.32 1.68,1.32, height 0.9
48MHZ_XTAL_PAD [mm]
  rect 2x4 smd: 1(-3,0) 2(3,0)
  silkscreen extent -4.38,-2.42 4.38,2.42
BGA48C75P8X6_950X800X100 [mm] "BGA, 48-Leads, Body 9.5x8.0mm,  Pitch 0.75mm"
  round 0.3 smd mask+0.06: A1(-1.875,2.625) A2(-1.125,2.625) A3(-0.375,2.625) A4(0.375,2.625) A5(1.125,2.625) A6(1.875,2.625) B1(-1.875,1.875) B2(-1.125,1.875) B3(-0.375,1.875) B4(0.375,1.875) B5(1.125,1.875) B6(1.875,1.875) C1(-1.875,1.125) C2(-1.125,1.125) C3(-0.375,1.125) C4(0.375,1.125) C5(1.125,1.125) C6(1.875,1.125) D1(-1.875,0.375) D2(-1.125,0.375) D3(-0.375,0.375) D4(0.375,0.375) D5(1.125,0.375) D6(1.875,0.375) E1(-1.875,-0.375) E2(-1.125,-0.375) E3(-0.375,-0.375) E4(0.375,-0.375) E5(1.125,-0.375) E6(1.875,-0.375) F1(-1.875,-1.125) F2(-1.125,-1.125) F3(-0.375,-1.125) F4(0.375,-1.125) F5(1.125,-1.125) F6(1.875,-1.125) G1(-1.875,-1.875) G2(-1.125,-1.875) G3(-0.375,-1.875) G4(0.375,-1.875) G5(1.125,-1.875) G6(1.875,-1.875) H1(-1.875,-2.625) H2(-1.125,-2.625) H3(-0.375,-2.625) H4(0.375,-2.625) H5(1.125,-2.625) H6(1.875,-2.625)
  silkscreen extent -4.78,-4.75 4,4.75, body extent -4,-4.75 4,4.75, height 1
BGA112 [mm] "BGA, 112-Leads, Body 10.0x10.0mm,  Pitch 0.80mm"
  round 0.3 smd: A1(-4,4) A2(-3.2,4) A3(-2.4,4) A4(-1.6,4) A5(-0.8,4) A6(0,4) A7(0.8,4) A8(1.6,4) A9(2.4,4) A10(3.2,4) A11(4,4) B1(-4,3.2) B2(-3.2,3.2) B3(-2.4,3.2) B4(-1.6,3.2) B5(-0.8,3.2) B6(0,3.2) B7(0.8,3.2) B8(1.6,3.2) B9(2.4,3.2) B10(3.2,3.2) B11(4,3.2) C1(-4,2.4) C2(-3.2,2.4) C3(-2.4,2.4) C4(-1.6,2.4) C5(-0.8,2.4) C6(0,2.4) C7(0.8,2.4) C8(1.6,2.4) C9(2.4,2.4) C10(3.2,2.4) C11(4,2.4) D1(-4,1.6) D2(-3.2,1.6) D3(-2.4,1.6) D4(-1.6,1.6) D5(-0.8,1.6) D6(0,1.6) D7(0.8,1.6) D8(1.6,1.6) D9(2.4,1.6) D10(3.2,1.6) D11(4,1.6) E1(-4,0.8) E2(-3.2,0.8) E3(-2.4,0.8) E4(-1.6,0.8) E8(1.6,0.8) E9(2.4,0.8) E10(3.2,0.8) E11(4,0.8) F1(-4,0) F2(-3.2,0) F3(-2.4,0) F4(-1.6,0) F8(1.6,0) F9(2.4,0) F10(3.2,0) F11(4,0) G1(-4,-0.8) G2(-3.2,-0.8) G3(-2.4,-0.8) G4(-1.6,-0.8) G8(1.6,-0.8) G9(2.4,-0.8) G10(3.2,-0.8) G11(4,-0.8) H1(-4,-1.6) H2(-3.2,-1.6) H3(-2.4,-1.6) H4(-1.6,-1.6) H5(-0.8,-1.6) H6(0,-1.6) H7(0.8,-1.6) H8(1.6,-1.6) H9(2.4,-1.6) H10(3.2,-1.6) H11(4,-1.6) J1(-4,-2.4) J2(-3.2,-2.4) J3(-2.4,-2.4) J4(-1.6,-2.4) J5(-0.8,-2.4) J6(0,-2.4) J7(0.8,-2.4) J8(1.6,-2.4) J9(2.4,-2.4) J10(3.2,-2.4) J11(4,-2.4) K1(-4,-3.2) K2(-3.2,-3.2) K3(-2.4,-3.2) K4(-1.6,-3.2) K5(-0.8,-3.2) K6(0,-3.2) K7(0.8,-3.2) K8(1.6,-3.2) K9(2.4,-3.2) K10(3.2,-3.2) K11(4,-3.2) L1(-4,-4) L2(-3.2,-4) L3(-2.4,-4) L4(-1.6,-4) L5(-0.8,-4) L6(0,-4) L7(0.8,-4) L8(1.6,-4) L9(2.4,-4) L10(3.2,-4) L11(4,-4)
  silkscreen extent -5.77,-5 5,5, body extent -5,-5 5,5, height 1.3
C1206 [mm] "Chip Capacitor, Body 3.2x1.6mm, IPC High Density"
  rect 1.1x1.7 smd: 1(-1.35,0) 2(1.35,0)
  silkscreen extent -0.4,-0.75 0.4,0.75, body extent -1.7,-0.9 1.7,0.9, height 1.3
C1210 [mm] "Chip Capacitor, Body 3.2x2.5mm, IPC High Density"
  rect 1.1x2.6 smd: 1(-1.35,0) 2(1.35,0)
  silkscreen extent -0.4,-1.2 0.4,1.2, body extent -1.7,-1.35 1.7,1.35, height 1.3
CAPR5-4X5 [mm] "Capacitor; 2 Leads"
  rect 1.35x1.35 hole 0.8: 1(-2.5,0)
  round 1.35 hole 0.8: 2(2.5,0)
  silkscreen extent -1.69,-2 1.82,2
CSG324 [mm] "BGA, 324-Leads, Body 15x15mm, Pitch 0.8mm"
  round 0.36 smd: A1(-6.8,6.8) A2(-6,6.8) A3(-5.2,6.8) A4(-4.4,6.8) A5(-3.6,6.8) A6(-2.8,6.8) A7(-2,6.8) A8(-1.2,6.8) A9(-0.4,6.8) A10(0.4,6.8) A11(1.2,6.8) A12(2,6.8) A13(2.8,6.8) A14(3.6,6.8) A15(4.4,6.8) A16(5.2,6.8) A17(6,6.8) A18(6.8,6.8) B1(-6.8,6) B2(-6,6) B3(-5.2,6) B4(-4.4,6) B5(-3.6,6) B6(-2.8,6) B7(-2,6) B8(-1.2,6) B9(-0.4,6) B10(0.4,6) B11(1.2,6) B12(2,6) B13(2.8,6) B14(3.6,6) B15(4.4,6) B16(5.2,6) B17(6,6) B18(6.8,6) C1(-6.8,5.2) C2(-6,5.2) C3(-5.2,5.2) C4(-4.4,5.2) C5(-3.6,5.2) C6(-2.8,5.2) C7(-2,5.2) C8(-1.2,5.2) C9(-0.4,5.2) C10(0.4,5.2) C11(1.2,5.2) C12(2,5.2) C13(2.8,5.2) C14(3.6,5.2) C15(4.4,5.2) C16(5.2,5.2) C17(6,5.2) C18(6.8,5.2) D1(-6.8,4.4) D2(-6,4.4) D3(-5.2,4.4) D4(-4.4,4.4) D5(-3.6,4.4) D6(-2.8,4.4) D7(-2,4.4) D8(-1.2,4.4) D9(-0.4,4.4) D10(0.4,4.4) D11(1.2,4.4) D12(2,4.4) D13(2.8,4.4) D14(3.6,4.4) D15(4.4,4.4) D16(5.2,4.4) D17(6,4.4) D18(6.8,4.4) E1(-6.8,3.6) E2(-6,3.6) E3(-5.2,3.6) E4(-4.4,3.6) E5(-3.6,3.6) E6(-2.8,3.6) E7(-2,3.6) E8(-1.2,3.6) E9(-0.4,3.6) E10(0.4,3.6) E11(1.2,3.6) E12(2,3.6) E13(2.8,3.6) E14(3.6,3.6) E15(4.4,3.6) E16(5.2,3.6) E17(6,3.6) E18(6.8,3.6) F1(-6.8,2.8) F2(-6,2.8) F3(-5.2,2.8) F4(-4.4,2.8) F5(-3.6,2.8) F6(-2.8,2.8) F7(-2,2.8) F8(-1.2,2.8) F9(-0.4,2.8) F10(0.4,2.8) F11(1.2,2.8) F12(2,2.8) F13(2.8,2.8) F14(3.6,2.8) F15(4.4,2.8) F16(5.2,2.8) F17(6,2.8) F18(6.8,2.8) G1(-6.8,2) G2(-6,2) G3(-5.2,2) G4(-4.4,2) G5(-3.6,2) G6(-2.8,2) G7(-2,2) G8(-1.2,2) G9(-0.4,2) G10(0.4,2) G11(1.2,2) G12(2,2) G13(2.8,2) G14(3.6,2) G15(4.4,2) G16(5.2,2) G17(6,2) G18(6.8,2) H1(-6.8,1.2) H2(-6,1.2) H3(-5.2,1.2) H4(-4.4,1.2) H5(-3.6,1.2) H6(-2.8,1.2) H7(-2,1.2) H8(-1.2,1.2) H9(-0.4,1.2) H10(0.4,1.2) H11(1.2,1.2) H12(2,1.2) H13(2.8,1.2) H14(3.6,1.2) H15(4.4,1.2) H16(5.2,1.2) H17(6,1.2) H18(6.8,1.2) J1(-6.8,0.4) J2(-6,0.4) J3(-5.2,0.4) J4(-4.4,0.4) J5(-3.6,0.4) J6(-2.8,0.4) J7(-2,0.4) J8(-1.2,0.4) J9(-0.4,0.4) J10(0.4,0.4) J11(1.2,0.4) J12(2,0.4) J13(2.8,0.4) J14(3.6,0.4) J15(4.4,0.4) J16(5.2,0.4) J17(6,0.4) J18(6.8,0.4) K1(-6.8,-0.4) K2(-6,-0.4) K3(-5.2,-0.4) K4(-4.4,-0.4) K5(-3.6,-0.4) K6(-2.8,-0.4) K7(-2,-0.4) K8(-1.2,-0.4) K9(-0.4,-0.4) K10(0.4,-0.4) K11(1.2,-0.4) K12(2,-0.4) K13(2.8,-0.4) K14(3.6,-0.4) K15(4.4,-0.4) K16(5.2,-0.4) K17(6,-0.4) K18(6.8,-0.4) L1(-6.8,-1.2) L2(-6,-1.2) L3(-5.2,-1.2) L4(-4.4,-1.2) L5(-3.6,-1.2) L6(-2.8,-1.2) L7(-2,-1.2) L8(-1.2,-1.2) L9(-0.4,-1.2) L10(0.4,-1.2) L11(1.2,-1.2) L12(2,-1.2) L13(2.8,-1.2) L14(3.6,-1.2) L15(4.4,-1.2) L16(5.2,-1.2) L17(6,-1.2) L18(6.8,-1.2) M1(-6.8,-2) M2(-6,-2) M3(-5.2,-2) M4(-4.4,-2) M5(-3.6,-2) M6(-2.8,-2) M7(-2,-2) M8(-1.2,-2) M9(-0.4,-2) M10(0.4,-2) M11(1.2,-2) M12(2,-2) M13(2.8,-2) M14(3.6,-2) M15(4.4,-2) M16(5.2,-2) M17(6,-2) M18(6.8,-2) N1(-6.8,-2.8) N2(-6,-2.8) N3(-5.2,-2.8) N4(-4.4,-2.8) N5(-3.6,-2.8) N6(-2.8,-2.8) N7(-2,-2.8) N8(-1.2,-2.8) N9(-0.4,-2.8) N10(0.4,-2.8) N11(1.2,-2.8) N12(2,-2.8) N13(2.8,-2.8) N14(3.6,-2.8) N15(4.4,-2.8) N16(5.2,-2.8) N17(6,-2.8) N18(6.8,-2.8) P1(-6.8,-3.6) P2(-6,-3.6) P3(-5.2,-3.6) P4(-4.4,-3.6) P5(-3.6,-3.6) P6(-2.8,-3.6) P7(-2,-3.6) P8(-1.2,-3.6) P9(-0.4,-3.6) P10(0.4,-3.6) P11(1.2,-3.6) P12(2,-3.6) P13(2.8,-3.6) P14(3.6,-3.6) P15(4.4,-3.6) P16(5.2,-3.6) P17(6,-3.6) P18(6.8,-3.6) R1(-6.8,-4.4) R2(-6,-4.4) R3(-5.2,-4.4) R4(-4.4,-4.4) R5(-3.6,-4.4) R6(-2.8,-4.4) R7(-2,-4.4) R8(-1.2,-4.4) R9(-0.4,-4.4) R10(0.4,-4.4) R11(1.2,-4.4) R12(2,-4.4) R13(2.8,-4.4) R14(3.6,-4.4) R15(4.4,-4.4) R16(5.2,-4.4) R17(6,-4.4) R18(6.8,-4.4) T1(-6.8,-5.2) T2(-6,-5.2) T3(-5.2,-5.2) T4(-4.4,-5.2) T5(-3.6,-5.2) T6(-2.8,-5.2) T7(-2,-5.2) T8(-1.2,-5.2) T9(-0.4,-5.2) T10(0.4,-5.2) T11(1.2,-5.2) T12(2,-5.2) T13(2.8,-5.2) T14(3.6,-5.2) T15(4.4,-5.2) T16(5.2,-5.2) T17(6,-5.2) T18(6.8,-5.2) U1(-6.8,-6) U2(-6,-6) U3(-5.2,-6) U4(-4.4,-6) U5(-3.6,-6) U6(-2.8,-6) U7(-2,-6) U8(-1.2,-6) U9(-0.4,-6) U10(0.4,-6) U11(1.2,-6) U12(2,-6) U13(2.8,-6) U14(3.6,-6) U15(4.4,-6) U16(5.2,-6) U17(6,-6) U18(6.8,-6) V1(-6.8,-6.8) V2(-6,-6.8) V3(-5.2,-6.8) V4(-4.4,-6.8) V5(-3.6,-6.8) V6(-2.8,-6.8) V7(-2,-6.8) V8(-1.2,-6.8) V9(-0.4,-6.8) V10(0.4,-6.8) V11(1.2,-6.8) V12(2,-6.8) V13(2.8,-6.8) V14(3.6,-6.8) V15(4.4,-6.8) V16(5.2,-6.8) V17(6,-6.8) V18(6.8,-6.8)
  silkscreen extent -8.27,-7.5 7.5,7.5, body extent -7.5,-7.5 7.5,7.5, height 1.5
HDR1X3 [mm] "Connector; Header; 3 Position"
  rect 1.5x1.5 hole 0.9: 1(0,0)
  round 1.5 hole 0.9: 2(2.54,0) 3(5.08,0)
  silkscreen extent -1.27,-1.27 6.35,1.27
HDR1X4 [mm] "Connector; Header; 4 Position"
  rect 1.5x1.5 hole 0.9: 1(0,0)
  round 1.5 hole 0.9: 2(2.54,0) 3(5.08,0) 4(7.62,0)
  silkscreen extent -1.27,-1.27 8.89,1.27
HDR2X10 [mm] "Connector; Header; 10x2 Position"
  rect 1.5x1.5 hole 0.9: 1(0,0)
  round 1.5 hole 0.9: 2(0,2.54) 3(2.54,0) 4(2.54,2.54) 5(5.08,0) 6(5.08,2.54) 7(7.62,0) 8(7.62,2.54) 9(10.16,0) 10(10.16,2.54) 11(12.7,0) 12(12.7,2.54) 13(15.24,0) 14(15.24,2.54) 15(17.78,0) 16(17.78,2.54) 17(20.32,0) 18(20.32,2.54) 19(22.86,0) 20(22.86,2.54)
  silkscreen extent -1.27,-1.27 24.13,3.81
HDR2X30 [mm] "Connector; Header; 30x2 Position"
  rect 1.5x1.5 hole 0.9: 1(0,0)
  round 1.5 hole 0.9: 2(0,2.54) 3(2.54,0) 4(2.54,2.54) 5(5.08,0) 6(5.08,2.54) 7(7.62,0) 8(7.62,2.54) 9(10.16,0) 10(10.16,2.54) 11(12.7,0) 12(12.7,2.54) 13(15.24,0) 14(15.24,2.54) 15(17.78,0) 16(17.78,2.54) 17(20.32,0) 18(20.32,2.54) 19(22.86,0) 20(22.86,2.54) 21(25.4,0) 22(25.4,2.54) 23(27.94,0) 24(27.94,2.54) 25(30.48,0) 26(30.48,2.54) 27(33.02,0) 28(33.02,2.54) 29(35.56,0) 30(35.56,2.54) 31(38.1,0) 32(38.1,2.54) 33(40.64,0) 34(40.64,2.54) 35(43.18,0) 36(43.18,2.54) 37(45.72,0) 38(45.72,2.54) 39(48.26,0) 40(48.26,2.54) 41(50.8,0) 42(50.8,2.54) 43(53.34,0) 44(53.34,2.54) 45(55.88,0) 46(55.88,2.54) 47(58.42,0) 48(58.42,2.54) 49(60.96,0) 50(60.96,2.54) 51(63.5,0) 52(63.5,2.54) 53(66.04,0) 54(66.04,2.54) 55(68.58,0) 56(68.58,2.54) 57(71.12,0) 58(71.12,2.54) 59(73.66,0) 60(73.66,2.54)
  silkscreen extent -1.27,-1.27 75.06,3.81
LED-0 [mil] "LED; 2 Leads"
  round 70 hole 50: 1(50,0) 2(-50,0)
  silkscreen extent -120,-400 120,150
MICT-CF-60 [mm] "BGA, 60-Balls, Body 10x8mm, Pitch 0.8mm"
  round 0.4 smd: A1(-3.2,4) A2(-2.4,4) A3(-1.6,4) A7(1.6,4) A8(2.4,4) A9(3.2,4) B1(-3.2,3.2) B2(-2.4,3.2) B3(-1.6,3.2) B7(1.6,3.2) B8(2.4,3.2) B9(3.2,3.2) C1(-3.2,2.4) C2(-2.4,2.4) C3(-1.6,2.4) C7(1.6,2.4) C8(2.4,2.4) C9(3.2,2.4) D1(-3.2,1.6) D2(-2.4,1.6) D3(-1.6,1.6) D7(1.6,1.6) D8(2.4,1.6) D9(3.2,1.6) E1(-3.2,0.8) E2(-2.4,0.8) E3(-1.6,0.8) E7(1.6,0.8) E8(2.4,0.8) E9(3.2,0.8) F2(-2.4,0) F3(-1.6,0) F7(1.6,0) F8(2.4,0) F9(3.2,0) G1(-3.2,-0.8) G2(-2.4,-0.8) G3(-1.6,-0.8) G7(1.6,-0.8) G8(2.4,-0.8) H2(-2.4,-1.6) H3(-1.6,-1.6) H7(1.6,-1.6) H8(2.4,-1.6) H9(3.2,-1.6) J1(-3.2,-2.4) J2(-2.4,-2.4) J3(-1.6,-2.4) J7(1.6,-2.4) J8(2.4,-2.4) K2(-2.4,-3.2) K3(-1.6,-3.2) K7(1.6,-3.2) K8(2.4,-3.2) K9(3.2,-3.2) L1(-3.2,-4) L2(-2.4,-4) L3(-1.6,-4) L7(1.6,-4) L8(2.4,-4)
  silkscreen extent -4.77,-5 4,5, body extent -4,-5 4,5, height 0.1
SOP4 [mm]
  round 2 smd: 1(5.08,-4.2) 2(5.08,0) 4(0,-4.2)
  rect 2x2 smd: 3(0,0)
  silkscreen extent -2.54,-6.3 7.62,2.1
SOT95P215X112-3N [mm] "SOT23, 3-Leads, Body 3.0x2.2mm (max), Pitch 0.95mm, IPC Medium Density"
  rect 1.15x0.75 smd: 1(-0.925,0.95) 2(-0.925,-0.95) 3(0.925,0)
  silkscreen extent -1.05,-1.5 0.65,2, body extent -0.65,-1.52 0.65,1.52, height 1.12
SOT95P280X145-5N [mm] "SOT23, 5-Leads, Body 3.0x3.0mm (max), Pitch 0.95mm, IPC Medium Density"
  rect 1.15x0.6 smd: 1(-1.175,0.95) 2(-1.175,0) 3(-1.175,-0.95) 4(1.175,-0.95) 5(1.175,0.95)
  silkscreen extent -1.3,-1.5 0.2,1.92, body extent -0.85,-1.5 0.85,1.5, height 1.45
SPST-2 [mm] "Switch; 2 Leads"
  rect 1.85x1.85 hole 1.1: 1(-2.54,0)
  round 1.85 hole 1.1: 2(2.54,0)
  silkscreen extent -4.89,-1.27 4.28,1.27
TSOP65P300X110-8N [mm] "TSOP, 8-Leads, Body 3.0x3.0mm (max), Pitch 0.65mm, IPC Medium Density"
  rect 2x0.45 smd: 1(-2.675,1.95) 2(-2.675,1.3) 3(-2.675,0.65) 4(-2.675,0) 5(0.275,0) 6(0.275,0.65) 7(0.275,1.3) 8(0.275,1.95)
  silkscreen extent -1.28,-0.53 -1.12,2.47, body extent -2.73,-0.55 0.33,2.5, height 1.1
USB2.5-2H4D [mm] "Connector; USB1.1, Type B, Thru-Hole; 4 Position; Right Angle"
  rect 1.6x1.6 hole 0.92: 1(-1,1.25)
  round 1.6 hole 0.92: 2(-1,-1.25) 3(1,-1.25) 4(1,1.25)
  round 3.8 hole 2.3: 5(3.71,6.02) 6(3.71,-6.02)
  silkscreen extent -3.18,-6.02 13.99,6.02, body extent -2.41,-6.02 13.99,6.02, height 11.1

## Part data
C1 C2 C3 C4 C5 C6 C7 C8 C9 C10 C11 C12 C13 C14 C15 C16 C17 C18 C19 C20 C21 C22 C23 C24 C25 C26 C27 C28 C29 C30 C31 C32 C33 C34 C35 C36 C37 C43 C44 C45 C46 C47 C48 C49 C50 C51 C52 C53 C54 C55 C56 C57 C58 C59 C60 C61 C62 C63 C64 UD VI VO XC1 XC2: "Capacitor (Semiconductor SIM Model)"
C38 C39 C40 C41 C42: "Capacitor"
D1: "Typical INFRARED GaAs LED"
D5: "Diode Bridge, MULTICOMP, 2KBP02M"
DDR: library part CMP-0354-00001-1, "1Gb DDR2-800 SDRAM, 128Mb x 8, 2.5ns, 1.8V, 0 to 85 degC, 60-Ball FBGA, Pb-Free"
F0 F1 F2 F3 U0 U1 U2 U3: "Typical RED, GREEN, YELLOW, AMBER GaAs LED"
FJTAG: library part "Header 4", "Header, 4-Pin"
FPGA: library part CMP-0067-00428-1, "Spartan-6 LX 1.2V FPGA, 226 User I/Os, 324-Ball Chip-Scale BGA (0.8mm Pitch), Speed Grade 2, Industrial Grade, Pb-Free"
HEast HNorth HWest: "Header, 30-Pin, Dual row"
OSC: "XO53050UITA"
POW5V POWGND: "Header, 3-Pin"
POWT: "Header, 4-Pin"
R1 R2 R3 R4 R5 R6 R7 R8 R9 R10: "Resistor"
U_RESET: "Switch"
UCDBG: "Header, 10-Pin, Dual row"

## Via types
v1: diameter 0.4, hole 0.25, Top Layer to Bottom Layer, tented top, 553 vias
v2: diameter 1, hole 0.5, Top Layer to Bottom Layer, 222 vias
v3: diameter 1.27, hole 0.5, Top Layer to Bottom Layer, 12 vias
v4: diameter 0.4, hole 0.25, Top Layer to Bottom Layer, 7 vias
v5: diameter 7, hole 5, Top Layer to Bottom Layer, 4 vias

## Nets (pads, with @x,y where several pads share a name; then routed paths per layer and width w, separated by ;. In a path a pad name is that pad's centre, name@x,y a point inside that pad or via, vN(x,y) a via of type N, cw(c..) or ccw(c..) an arc to the next point about the centre after c; other vN are vias at no path point)
0V9: 0V9.2 DDR.E2 FPGA.C1 FPGA.M5 FPGA.N3 | length 72.8
  Top Layer w0.1: 0V9.2@110.775,44.15 110.325,44.6 107.625,44.6 107.175,45.05 107.175,49.85 112.45,55.125 112.45,74.125 ; 112.125,54.775 122.025,54.775 DDR.E2@122.4,54.4
  Top Layer w0.254: 112.45,74.125 118.35,74.125 119.375,75.15 v1@119.375,75.6 ; v1(119.368,75.604) FPGA.C1@119.768,76.004 ; FPGA.M5@126.968,79.204 v1(127.368,78.804) ; FPGA.N3@127.768,77.604 v1(128.168,77.204)
  Layer5 w0.1: v1@128.125,77.15 v1@128.125,77.25
  Layer4 w0.1: v1@119.4,75.6 119.4,76.55 119.775,76.925 119.775,80.525 120.05,80.8 126.825,80.8 126.95,80.675 126.95,79.225 127.725,78.45 128.7,78.45 128.85,78.3 128.85,77.886 v1(128.168,77.204)
1V2: C7.2 C8.2 C9.2 C10.2 C11.2 C12.2 C13.2 C14.2 C15.2 C16.2 C17.2 C41.1 FPGA.G7 FPGA.H9 FPGA.H11 FPGA.J8 FPGA.J10 FPGA.K9 FPGA.K11 FPGA.L8 FPGA.L10 FPGA.M7 FPGA.M12 MIC1.5 POWT.1 | length 221
  Top Layer w0.254: v1(122.568,80.404) FPGA.G7@122.968,80.804 ; v1(123.368,82.004) FPGA.H9@123.768,82.404 ; FPGA.H11@123.768,84.004 123.771,84.004 v1@124.15,83.625 ; v1(124.168,81.204) FPGA.J8@124.568,81.604 ; v1(124.168,83.604) FPGA.J10@124.568,83.204 ; FPGA.K9@125.368,82.404 v1(125.768,82.004) ; FPGA.K11@125.368,84.004 v1(125.768,84.404) ; v1@125.775,81.997 FPGA.L8@126.168,81.604 FPGA.M7@126.968,80.804 ; FPGA.L10@126.168,83.204 v1(126.568,83.604) ; FPGA.M12@126.968,84.804 v1(127.368,85.204)
  Top Layer w0.4: v2(87.075,23.375) 87.075,22.3 C7.2@87.725,21.65 88.65,22.575 v2(88.65,24.675) ; MIC1.5@90.15,21.5 90.15,23.225 90.475,23.55 v2(90.9,23.55)
  Layer2 w0.508: v2(90.9,23.55) 97.1,23.55 100.75,19.9 100.75,18.375 103.3,15.825 113.275,15.825 117.525,20.075 POWT.1@118.675,20.075
  Bottom Layer w0.1: v1(122.568,80.404) 122.95,80.786 122.95,82.887 ; 124.956,84.775 126.939,84.775 v1(127.368,85.204)
  Bottom Layer w0.254: v1(123.368,82.004) 123.375,82.011 123.375,82.637 ; 123.936,82.887 124.168,82.887 v1(124.168,83.604) ; v1(124.168,81.204) 124.952,81.204 124.956,81.2 ; 124.917,82.637 125.135,82.637 ; 124.956,84.425 124.977,84.404 v1(125.768,84.404) ; v1(125.768,82.004) 125.135,82.637 ; v1(126.568,83.604) 125.848,82.885 125.135,82.885 125.135,82.637
  Bottom Layer w0.508: C16.2@115.075,82.887 122.95,82.887 123.936,82.887 124.667,82.887 124.917,82.637 ; C12.2@125,94 124.956,93.956 124.956,84.775 124.956,84.425 124.956,81.2 124.956,72.52 C15.2@125.05,72.425
  Bottom Layer w1: v2(87.075,23.375) 87.075,26.15 90.175,29.25 93.225,29.25 ; v2(88.65,24.675) 92.725,28.75 ; v2(90.9,23.55) 94.55,27.2 ; 93.8,28.25 C41.1@95.5,26.55 ; C8.2@114.78,93.87 116.5,92.15 116.75,92.15 ; C13.2@130.05,94 125,94 C12.2@124.325,94 C11.2@118.6,94 116.75,92.15 ; C9.2@130.25,72.425 C15.2@125.05,72.425 C14.2@119.85,72.425 113.25,72.425 113.25,73.8 115.075,75.625 C10.2@115.075,76.975 115.075,82.887 C17.2@115.075,88.3 115.075,90.475 116.75,92.15
  Bottom Layer w3: 93.475,29.5 106.425,42.45 106.425,58.025 112.125,63.725 112.125,71.35 113.2,72.425
1V8: C1.2 C18.2 C19.2 C20.2 C21.2 C22.2 C23.2 C24.2 C25.2 C26.2 C27.2 C38.1 DDR.A1 DDR.A9 DDR.C1 DDR.C3 DDR.C7 DDR.C9 DDR.E1 DDR.E9 DDR.H9 DDR.L1 FPGA.E2 FPGA.G4 FPGA.J2 FPGA.J5 FPGA.M4 FPGA.R2 POWT.2 PSU1.1 PSU1.4 R1.2 | length 77.9
  Top Layer w0.2: DDR.C3@123.2,56 123.6,56.4 v1(123.675,56.4) ; v4(131.9,43.925) C25.2@131.9,45.225
  Top Layer w0.254: v2@102.85,22.075 v2(102.625,21.85) 102.625,16.675 103.5,15.8 106.9,15.8 107.45,16.35 PSU1.1@107.45,19.125 ; v2(110.75,23.725) 110.675,23.65 110.675,20.4 109.4,19.125 109.6,19.125 110.95,20.475 113.175,20.475 v2(114.425,21.725) ; v1(120.968,76.404) FPGA.E2@121.368,76.804 ; v1(121.15,54.375) 121.575,54.375 DDR.E1@121.6,54.4 ; v1(121.2,56) DDR.C1@121.6,56 ; DDR.L1@121.6,49.6 v1(121.6,50) ; DDR.A1@121.6,57.6 v1(121.6,58.25) ; v1(122.568,78.004) FPGA.G4@122.968,78.404 ; v1(124.168,76.404) FPGA.J2@124.568,76.804 ; v1(124.168,78.804) FPGA.J5@124.568,79.204 ; v1@125.925,56.375 126.3,56 DDR.C7@126.4,56 ; FPGA.M4@126.968,78.404 v1(127.368,78.004) ; DDR.H9@128,52 v1(128.4,52.4) ; DDR.E9@128,54.4 v1(128.4,54.4) ; DDR.C9@128,56 v1(128.4,56) ; DDR.A9@128,57.6 v1(128.4,58) ; FPGA.R2@129.368,76.804 v1(129.768,76.404)
  Top Layer w0.4: R1.2@105.25,28.3 v2(105.25,29.9) ; C1.2@112.3,21.925 112.3,23.35 v2(114.325,25.375) ; C1.2@112.35,21.875 112.775,21.875 v2(114.45,23.55) ; C26.2@130.9,57 132.1,55.8 v2(132.1,55.15) ; C27.2@130.925,59.35 132.375,60.8 v2(132.375,61.125)
  Top Layer w1: C18.2@117.45,49.875 v2(117.45,51.5) ; v2(117.5,40.825) C20.2@117.5,42.525 ; C21.2@120.38,45.225 v2(120.38,46.995) ; C22.2@123.26,45.225 v2(123.26,46.99) ; C23.2@126.14,45.225 v2(126.14,46.885) ; C24.2@129.02,45.225 v2(129.02,46.855) ; C19.2@131.95,49.875 131.95,51.025 133.275,52.35 v2(133.275,52.8)
  Layer2 w1: v2@114.325,25.35 119.225,25.35 121.55,23.025 121.55,18.375 120.785,17.61 POWT.2@118.6,17.61
  other v1: 125.85,56.375
3V3: 0V9.1 C4.2 C28.2 C29.2 C30.2 C31.2 C32.2 C33.2 C34.2 C35.2 C36.2 C37.2 C40.1 C43.2 C44.2 C45.2 C46.2 C47.2 C48.2 C49.2 C50.2 C51.2 C52.2 C53.1 C54.2 C55.2 C56.2 C57.2 C58.2 C59.2 C60.2 C61.2 C62.2 C63.2 C64.2 FPGA.B1 FPGA.B5 FPGA.B10 FPGA.B15 FPGA.B17 FPGA.D7 FPGA.D13 FPGA.E5 FPGA.E9 FPGA.E10 FPGA.E14 FPGA.E17 FPGA.G10 FPGA.G15 FPGA.J12 FPGA.J14 FPGA.J17 FPGA.K7 FPGA.M9 FPGA.M15 FPGA.N12 FPGA.P5 FPGA.P9 FPGA.P10 FPGA.P14 FPGA.R6 FPGA.R12 FPGA.R17 FPGA.T15 FPGA.U4 FPGA.U9 FPGA.U14 HEast.23 HEast.25 HEast.27 HNorth.56 HNorth.58 HWest.49 HWest.51 MIC1.3 OSC.1 OSC.4 POWT.3 PSU2.1 PSU2.4 R2.2 R6.1 R7.1 R8.1 R10.1 SR1.D6 SR1.E1 SR2.D6 SR2.E1 U.D5 U.D7 U.F8 U.G4 U.G8 U.H7 U.K8 U.K9 U.L4 U.L10 UCDBG.1 | length 210.9
  Top Layer w0.1: v1(161.7,48.975) SR2.D6@162.075,49.35 ; v1(161.725,59.6) SR1.D6@162.1,59.975 ; SR2.E1@165.825,50.1 v1(166.2,50.475) ; SR1.E1@165.85,60.725 v1(166.225,61.1)
  Top Layer w0.254: v2(71.075,23.675) 69.7,22.3 69.7,16.725 71.2,15.225 73.125,15.225 73.9,16 PSU2.1@73.9,19.125 ; PSU2.4@75.85,19.125 75.85,19.825 76.575,20.55 76.575,22.65 ; 76.6,22.675 77.45,23.525 v2(78.725,23.525) ; MIC1.3@92.05,19.15 94.55,19.15 96.7,21.3 v2(96.75,21.3) ; v1(118.568,75.604) FPGA.B1@118.968,76.004 ; v1(118.568,78.804) FPGA.B5@118.968,79.204 ; v1(118.568,83.604) FPGA.B10@118.968,83.204 ; v1(118.568,87.604) FPGA.B15@118.968,87.204 ; v1(118.568,89.204) FPGA.B17@118.968,88.804 ; v1(120.168,80.404) FPGA.D7@120.568,80.804 ; v1(120.168,86.004) FPGA.D13@120.568,85.604 ; v1(120.968,78.804) FPGA.E5@121.368,79.204 ; v1(120.968,82.004) FPGA.E9@121.368,82.404 ; v1(120.968,83.604) FPGA.E10@121.368,83.204 ; v1(120.968,86.804) FPGA.E14@121.368,86.404 ; v1(120.968,89.204) FPGA.E17@121.368,88.804 ; v1(122.568,83.604) FPGA.G10@122.968,83.204 ; v1@122.568,87.604 FPGA.G15@122.968,87.204 ; v1(124.168,85.204) FPGA.J12@124.568,84.804 ; v1(124.168,86.804) FPGA.J14@124.568,86.404 ; v1(124.168,89.204) FPGA.J17@124.568,88.804 ; FPGA.K7@125.368,80.804 v1(125.768,80.404) ; FPGA.M9@126.968,82.404 v1(127.368,82.004) ; FPGA.M15@126.968,87.204 v1(127.368,87.604) ; FPGA.N12@127.768,84.804 v1(128.168,85.204) ; FPGA.P5@128.568,79.204 v1(128.968,78.804) ; FPGA.P9@128.568,82.404 v1(128.968,82.004) ; FPGA.P10@128.568,83.204 v1(128.968,83.604) ; FPGA.P14@128.568,86.404 v1(128.968,86.804) ; FPGA.R6@129.368,80.004 v1(129.768,79.604) ; FPGA.R12@129.368,84.804 v1(129.768,85.204) ; FPGA.R17@129.368,88.804 v1(129.768,89.204) ; FPGA.T15@130.168,87.204 v1(130.568,87.604) ; FPGA.U4@130.968,78.404 v1(131.368,78.004) ; FPGA.U9@130.968,82.404 v1(131.368,82.004) ; FPGA.U14@130.968,86.404 v1(131.368,86.804) ; v1(148.575,45.75) U.L4@148.975,46.15 ; v1(148.575,48.95) U.G4@148.975,49.35 ; v1(149.375,52.15) U.D5@149.775,51.75 ; U.H7@151.375,48.55 v1(151.775,48.15) ; U.D7@151.375,51.75 v1(151.775,52.15) ; U.K8@152.175,46.95 v1(152.575,46.55) ; U.G8@152.175,49.35 v1(152.575,48.95) ; U.F8@152.175,50.15 v1(152.575,49.75) ; U.K9@152.975,46.95 v1(153.375,46.55) ; U.L10@153.775,46.15 v1(154.175,45.75) ; R6.1@160.75,82 163.275,82 v2(163.3,81.975)
  Top Layer w0.4: R2.2@71.927,28.3 v2(71.927,30.273) ; C4.2@78.3,21.875 80.275,21.875 v2@80.3,21.9 ; v2(109.075,46.175) 0V9.1@110.875,46.175
  Top Layer w0.508: v2(143.25,93.525) v2@143.25,93.65
  Top Layer w1: v2(107.05,92.35) 110,95.3 C31.2@117.4,95.3 141.6,95.3 v2@143.25,93.65 ; v2(108.55,74.25) 110.375,74.25 111,74.875 C28.2@111,76.625 111,89 109.8,90.2 v2(108.7,90.2) ; v2(138.725,56.525) 140.425,54.825 C43.2@140.425,54.375 ; v2(139.35,41.8) 140.425,42.875 C46.2@140.425,44.925 ; v2(139.8,74.376) 137.025,77.151 137.025,89.525 v2(140.925,93.425) ; C43.2@140.425,54.075 C44.2@140.425,51.225 C45.2@140.425,48.075 ; v2@140.725,59.775 v2(140.8,59.775) C51.2@146.125,59.775 C50.2@150.337,59.775 C49.2@154.55,59.775 ; v2(141.875,46.625) C45.2@140.425,48.075 ; v2(142.375,42.975) C46.2@140.425,44.925 ; OSC.4@155.575,89.65 OSC.4@155.725,89.65 160.725,89.65 163.3,87.075 v2(163.3,81.975) ; R10.1@157.05,75.15 157.075,75.175 v2(157.075,76.575) ; R8.1@163.9,75.2 v2(163.9,76.5) ; R7.1@167.175,75.25 v2(167.175,76.475) ; C46.2@140.425,44.925 C45.2@140.425,48.075
  Layer4 w0.1: v1(154.175,45.75) v1@154.35,45.75
  Bottom Layer w1: v2(143.8,41.15) C48.2@146,43.35 156.625,43.35 v2(159.025,40.95)
  other v1: 122.631,87.604
  other v2: 80.325,21.925